# EAGLE board fmcboard_v1.6s (EAGLE 9.6.2), part 1 of 2
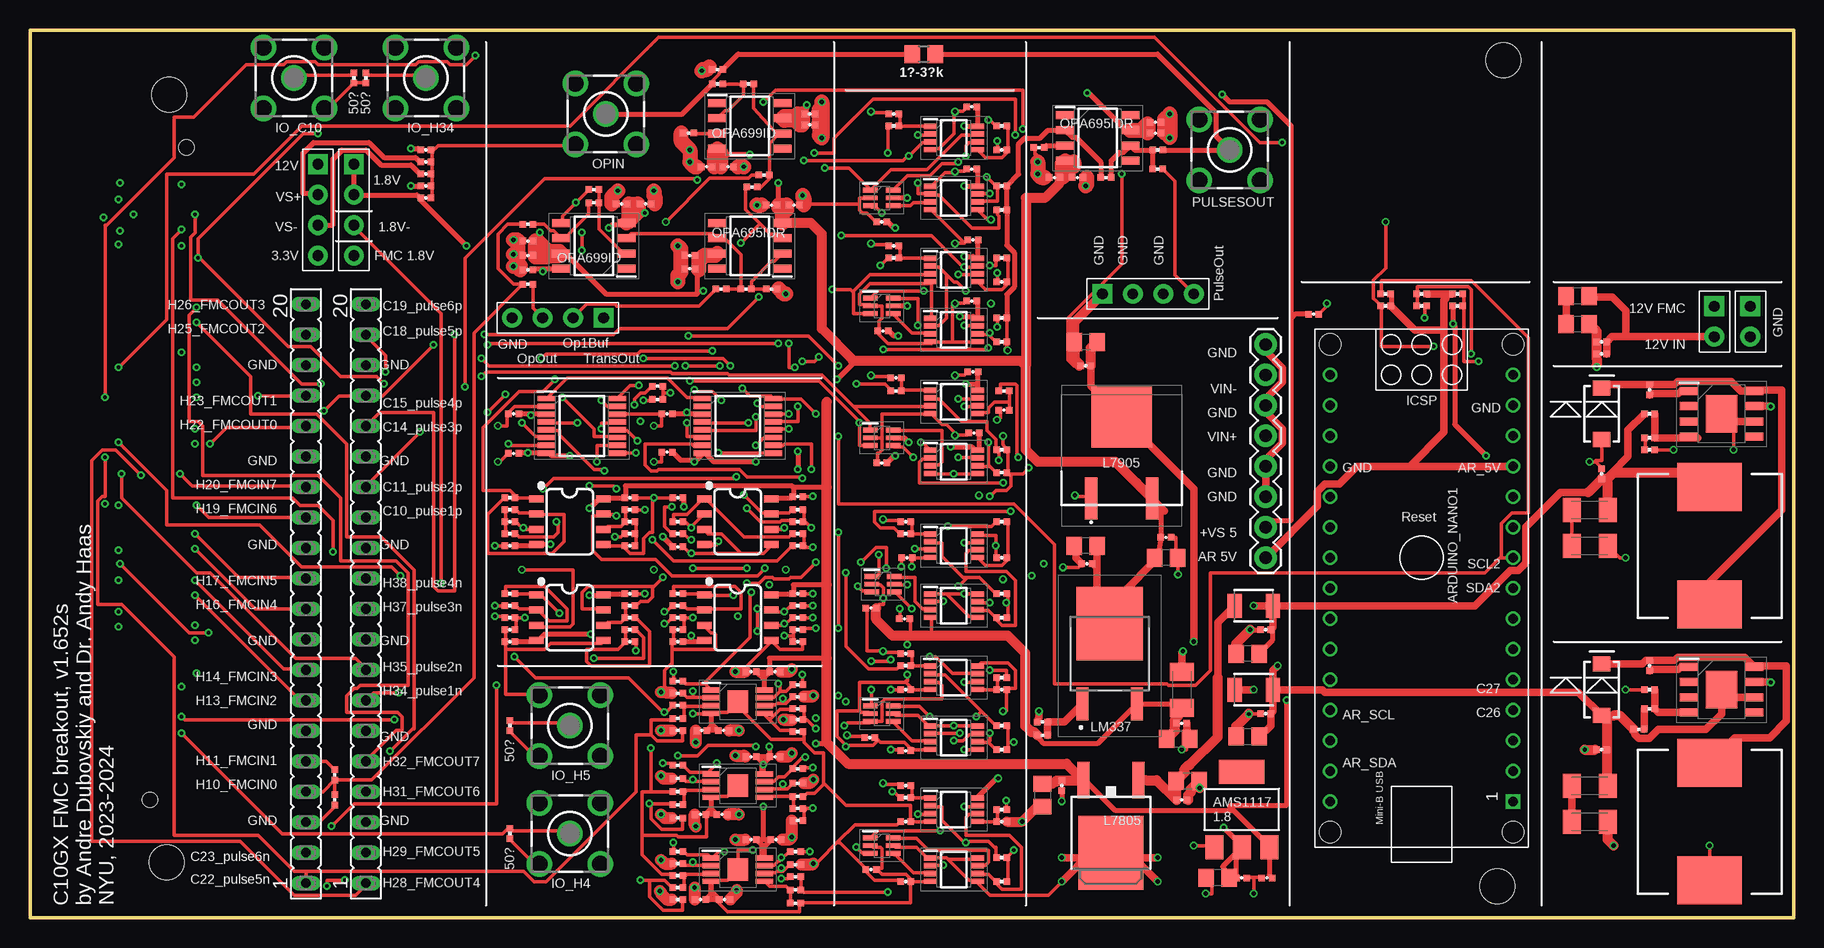
[diagram p0: board, top side]
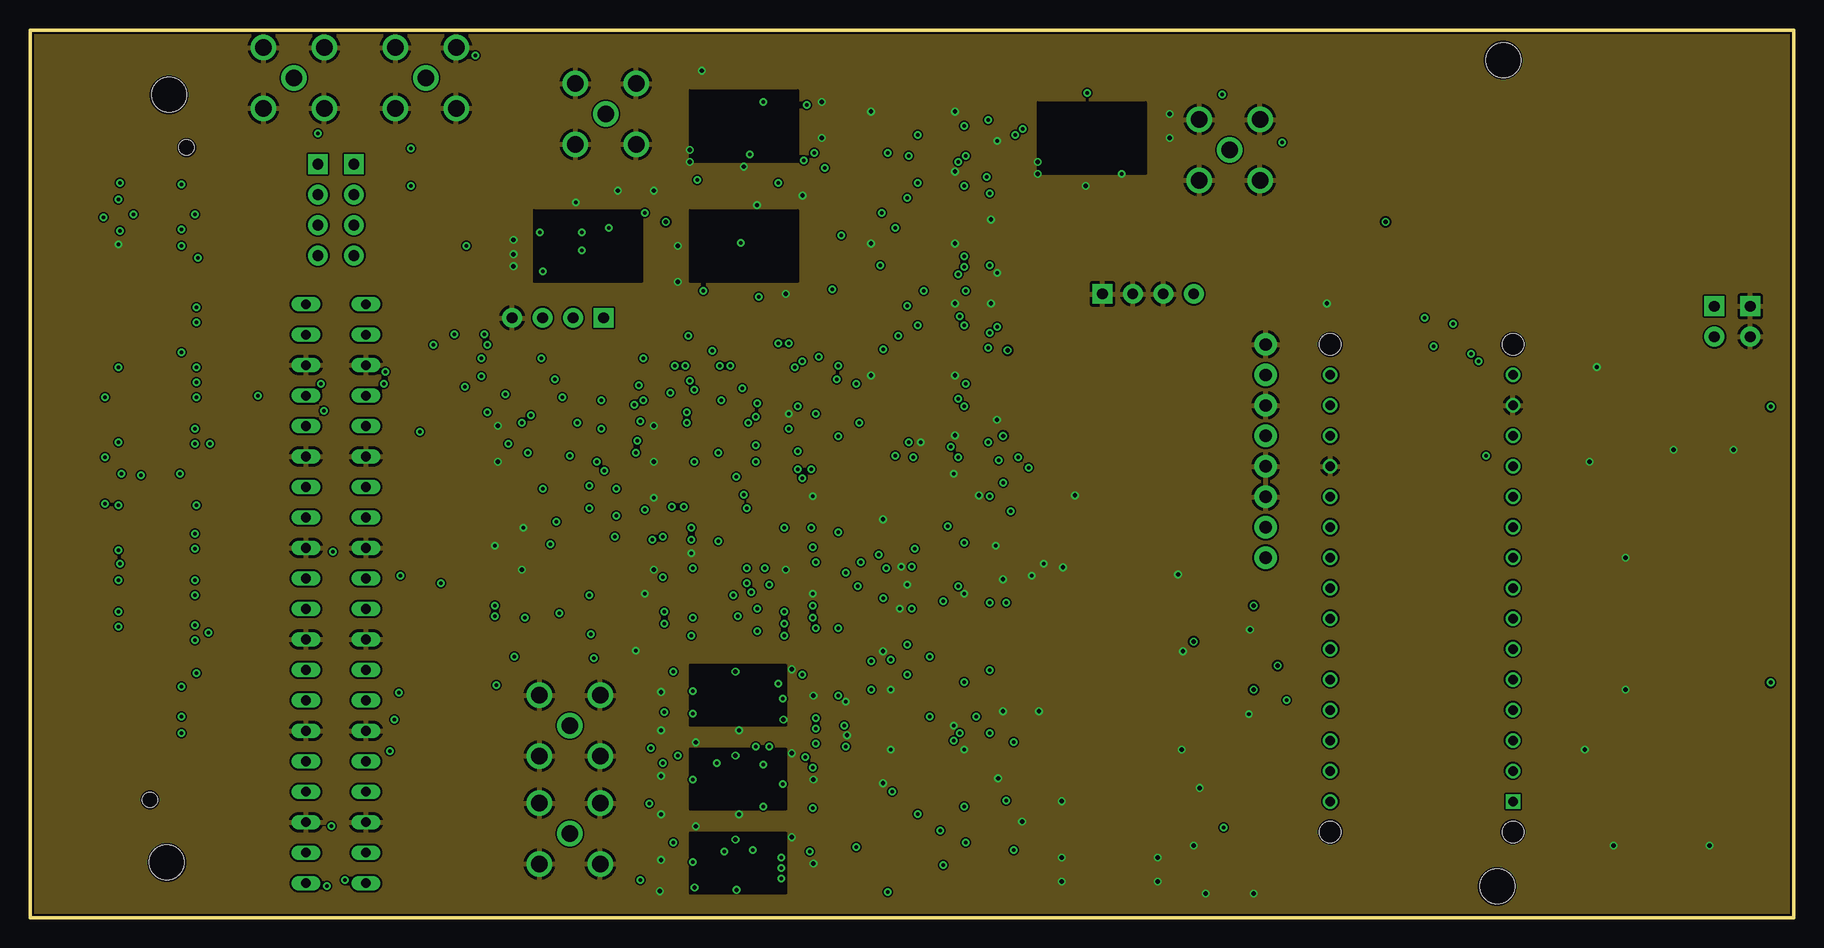
[diagram p1: board, inner layer topgnd]
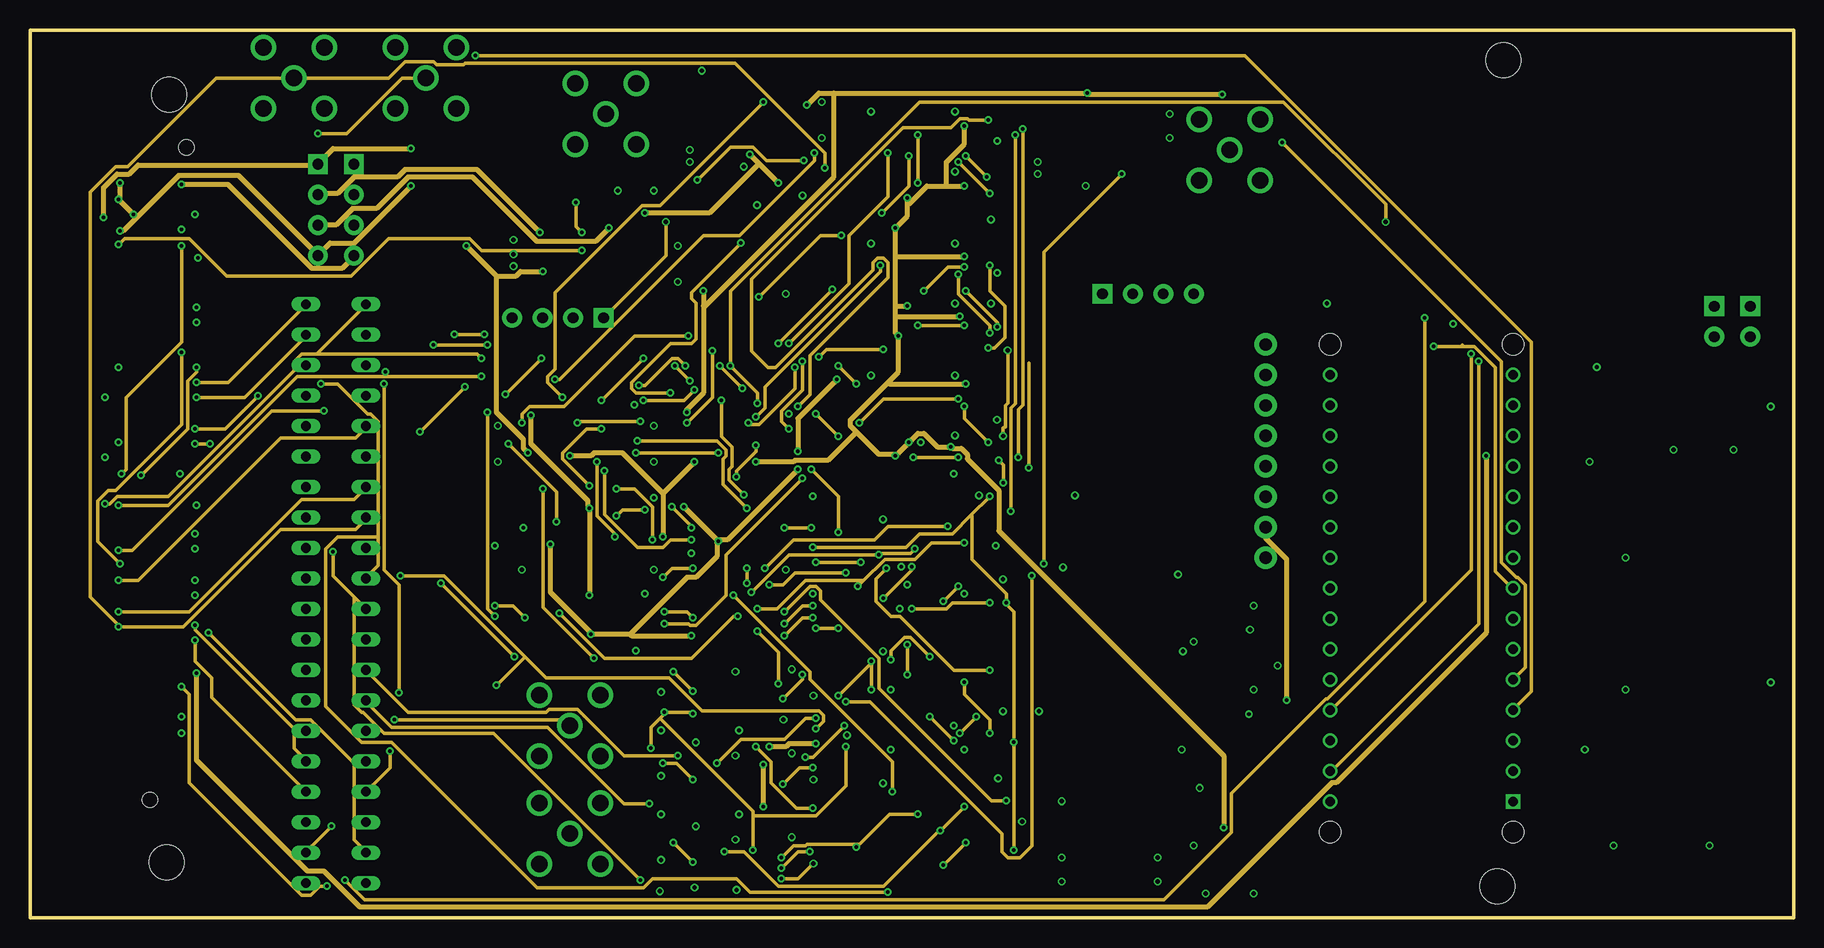
[diagram p2: board, inner layer route]
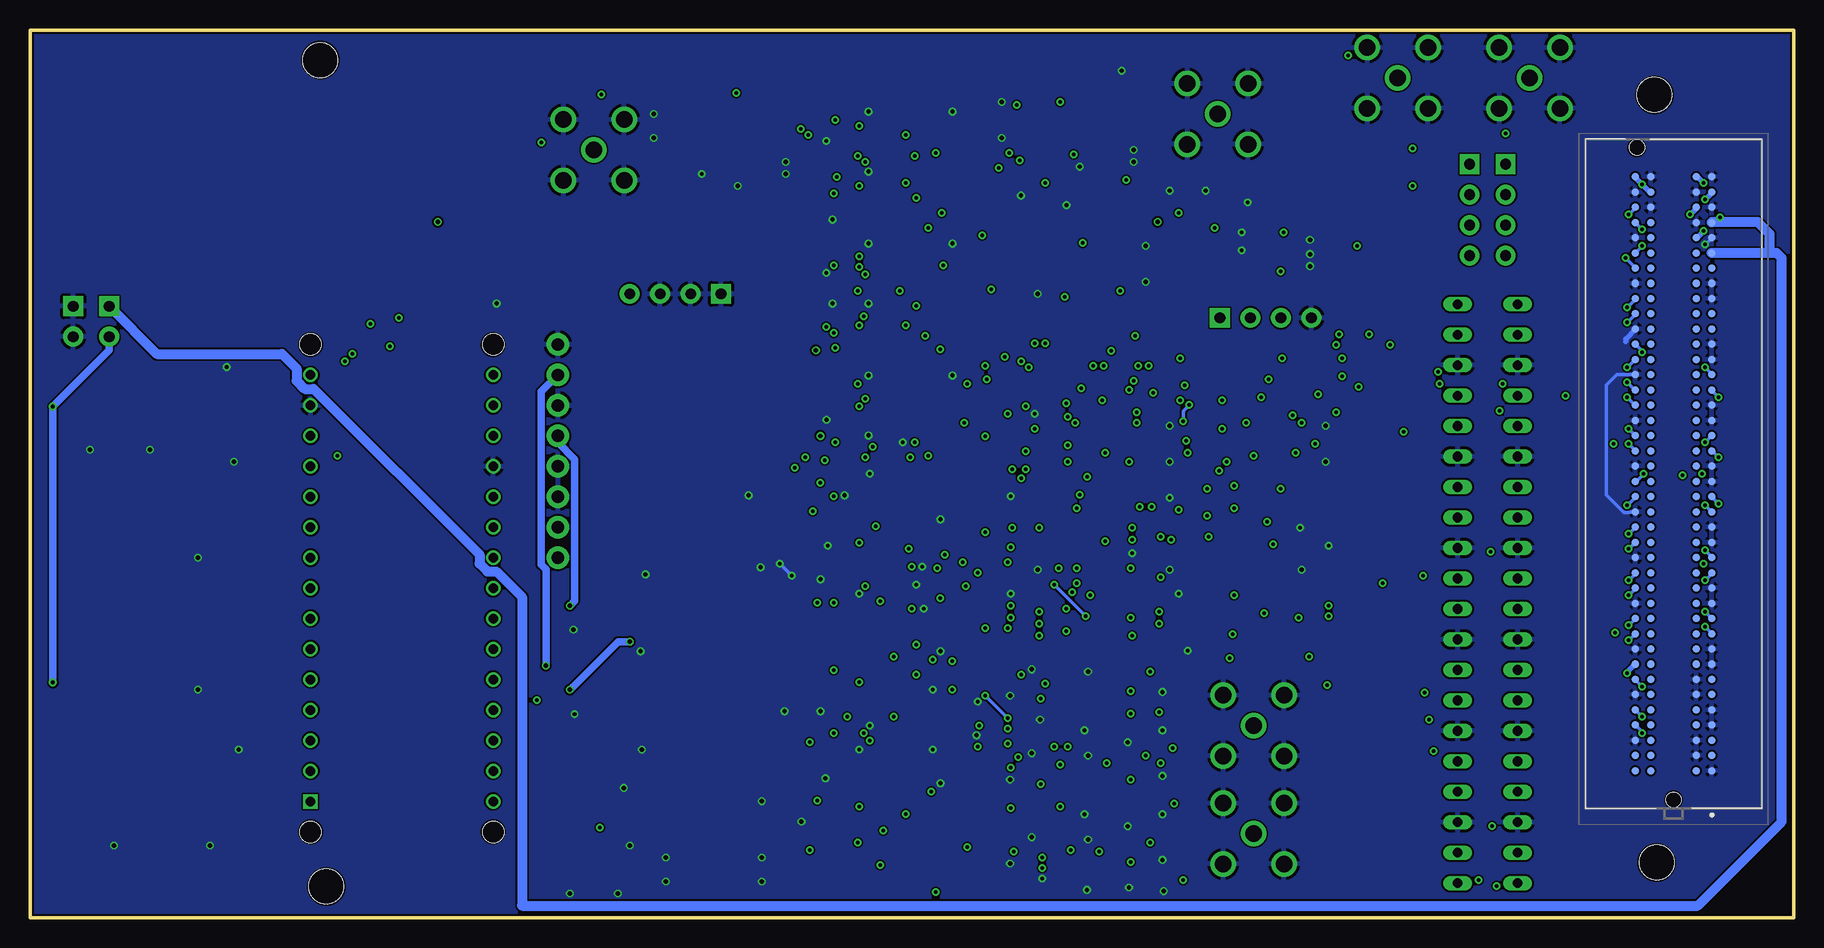
[diagram p3: board, bottom side, seen from below]

Size 147 x 74 mm. Coordinates in mm from the lower left corner, seen from the top.
Outline: 0,74 0,0 147,0 147,74 0,74
Copper layers (1*2*15*16): top 0.035mm / dielectric 0.2mm / topgnd 0.0175mm / dielectric 0.3mm / route 0.0175mm / dielectric 0.2mm / gnd 0.035mm
Design rules "Seeed_AllPCB_MacroFab_haas6mil *": minimum track width 6mil, minimum drill 12mil, track to track 6mil, track to pad 6mil, pad to pad 6mil, via to via 6mil, smd to smd 0mil, copper to edge 6mil, drill to drill 6mil, minimum pad ring 6mil, minimum via ring 6mil, stop-mask expansion 6mil, vias tented up to drill 25mil, thermal gap 10mil
Net classes: 0 default: width 0.305 mm; 1 power: width 0.406 mm; 2 gnd: width 0.305 mm
Holes 2.9 mm at 11.4,4.6 122.8,71.5 11.6,68.6 122.3,2.6

## Footprints (pad centres in the part's own frame; a part is rotated, then mirrored left to right if it is on the bottom)
ARDUINO_NANO = drill 0.8 square: 1 -20.32,-7.62 | drill 0.8: 2 -17.78,-7.62; 3 -15.24,-7.62; 4 -12.7,-7.62; 5 -10.16,-7.62; 6 -7.62,-7.62; 7 -5.08,-7.62; 8 -2.54,-7.62; 9 0,-7.62; 10 2.54,-7.62; 11 5.08,-7.62; 12 7.62,-7.62; 13 10.16,-7.62; 14 12.7,-7.62; 15 15.24,-7.62; 16 15.24,7.62; 17 12.7,7.62; 18 10.16,7.62; 19 7.62,7.62; 20 5.08,7.62; 21 2.54,7.62; 22 0,7.62; 23 -2.54,7.62; 24 -5.08,7.62; 25 -7.62,7.62; 26 -10.16,7.62; 27 -12.7,7.62; 28 -15.24,7.62; 29 -17.78,7.62; 30 -20.32,7.62 | hole 1.778: -22.86,-7.62; -22.86,7.62; 17.78,7.62; 17.78,-7.62
C0805 = smd 1.3 x 1.5: 1 -0.95,0; 2 0.95,0
0402_CAP = smd 0.536 x 0.546: 1 -0.433,0; 2 0.433,0
C1206K = smd 1.5 x 2: 1 -1.5,0; 2 1.5,0
SMA-DIODE = smd 1.27 x 1.47: A -2.15,0; C 2.15,0
SOIC127P600X175-8N = smd 1.528 x 0.65: 1 -2.711,1.905; 2 -2.711,0.635; 3 -2.711,-0.635; 4 -2.711,-1.905; 5 2.711,-1.905; 6 2.711,-0.635; 7 2.711,0.635; 8 2.711,1.905
SOP65P640X120-16N = smd 1.475 x 0.45: 1 -2.938,2.275; 2 -2.938,1.625; 3 -2.938,0.975; 4 -2.938,0.325; 5 -2.938,-0.325; 6 -2.938,-0.975; 7 -2.938,-1.625; 8 -2.938,-2.275; 9 2.938,-2.275; 10 2.938,-1.625; 11 2.938,-0.975; 12 2.938,-0.325; 13 2.938,0.325; 14 2.938,0.975; 15 2.938,1.625; 16 2.938,2.275
SOP65P490X110-9N = smd 1.425 x 0.45: 1 -2.212,0.975; 2 -2.212,0.325; 3 -2.212,-0.325; 4 -2.212,-0.975; 5 2.212,-0.975; 6 2.212,-0.325; 7 2.212,0.325; 8 2.212,0.975 | smd 1.68 x 1.88: 9 0,0
SO08 = smd 0.6 x 1.2: 1 -1.905,-2.8; 2 -0.635,-2.8; 3 0.635,-2.8; 4 1.905,-2.8; 5 1.905,2.8; 6 0.635,2.8; 7 -0.635,2.8; 8 -1.905,2.8
TO252 = smd 1 x 3.048: 1 -2.28,-3.556; 2 2.28,-3.556 | smd 5.4 x 6.2: 3 0,2.5
SOP65P400X130-8N = smd 1.1 x 0.45: 1 -1.95,0.975; 2 -1.95,0.325; 3 -1.95,-0.325; 4 -1.95,-0.975; 5 1.95,-0.975; 6 1.95,-0.325; 7 1.95,0.325; 8 1.95,0.975
SOT65P210X110-6N = smd 1.2 x 0.4: 1 -0.95,0.65; 2 -0.95,0; 3 -0.95,-0.65; 4 0.95,-0.65; 5 0.95,0; 6 0.95,0.65
MC7905ACD2TR4G = smd 1.016 x 3.504: 1 -2.54,-4.064; 3 2.54,-4.064 | smd 5.08 x 5.08: 2 0,2.745
SOT223 = smd 1.499 x 2.007: 1 -2.261,-3.15; 2 0.025,-3.15; 3 2.311,-3.15 | smd 3.81 x 2.007: 4 0,3.15
LM337KVURG3 = smd 1 x 2.75: 1 -2.29,-4.2; 3 2.29,-4.2 | smd 5.55 x 6.15: 2 0,2.5
SOIC127P600X170-9N = smd 1.525 x 0.65: 1 -2.712,1.905; 2 -2.712,0.635; 3 -2.712,-0.635; 4 -2.712,-1.905; 5 2.712,-1.905; 6 2.712,-0.635; 7 2.712,0.635; 8 2.712,1.905 | smd 2.6 x 3.1: 9 0,0
BU-SMB-V = drill 1.4: 1 0,0; 2 -2.54,2.54; 3 2.54,2.54; 4 2.54,-2.54; 5 -2.54,-2.54
1X08 = drill 1.016 pad 1.88: 1 0,0; 2 2.54,0; 3 5.08,0; 4 7.62,0; 5 10.16,0; 6 12.7,0; 7 15.24,0; 8 17.78,0
ASP13460401 = smd 0.64 x 0.64: C1 24.765,3.175; C2 23.495,3.175; C3 22.225,3.175; C4 20.955,3.175; C5 19.685,3.175; C6 18.415,3.175; C7 17.145,3.175; C8 15.875,3.175; C9 14.605,3.175; C10 13.335,3.175; C11 12.065,3.175; C12 10.795,3.175; C13 9.525,3.175; C14 8.255,3.175; C15 6.985,3.175; C16 5.715,3.175; C17 4.445,3.175; C18 3.175,3.175; C19 1.905,3.175; C20 0.635,3.175; C21 -0.635,3.175; C22 -1.905,3.175; C23 -3.175,3.175; C24 -4.445,3.175; C25 -5.715,3.175; C26 -6.985,3.175; C27 -8.255,3.175; C28 -9.525,3.175; C29 -10.795,3.175; C30 -12.065,3.175; C31 -13.335,3.175; C32 -14.605,3.175; C33 -15.875,3.175; C34 -17.145,3.175; C35 -18.415,3.175; C36 -19.685,3.175; C37 -20.955,3.175; C38 -22.225,3.175; C39 -23.495,3.175; C40 -24.765,3.175; D1 24.765,1.905; D2 23.495,1.905; D3 22.225,1.905; D4 20.955,1.905; D5 19.685,1.905; D6 18.415,1.905; D7 17.145,1.905; D8 15.875,1.905; D9 14.605,1.905; D10 13.335,1.905; D11 12.065,1.905; D12 10.795,1.905; D13 9.525,1.905; D14 8.255,1.905; D15 6.985,1.905; D16 5.715,1.905; D17 4.445,1.905; D18 3.175,1.905; D19 1.905,1.905; D20 0.635,1.905; D21 -0.635,1.905; D22 -1.905,1.905; D23 -3.175,1.905; D24 -4.445,1.905; D25 -5.715,1.905; D26 -6.985,1.905; D27 -8.255,1.905; D28 -9.525,1.905; D29 -10.795,1.905; D30 -12.065,1.905; D31 -13.335,1.905; D32 -14.605,1.905; D33 -15.875,1.905; D34 -17.145,1.905; D35 -18.415,1.905; D36 -19.685,1.905; D37 -20.955,1.905; D38 -22.225,1.905; D39 -23.495,1.905; D40 -24.765,1.905; G1 24.765,-1.905; G2 23.495,-1.905; G3 22.225,-1.905; G4 20.955,-1.905; G5 19.685,-1.905; G6 18.415,-1.905; G7 17.145,-1.905; G8 15.875,-1.905; G9 14.605,-1.905; G10 13.335,-1.905; G11 12.065,-1.905; G12 10.795,-1.905; G13 9.525,-1.905; G14 8.255,-1.905; G15 6.985,-1.905; G16 5.715,-1.905; G17 4.445,-1.905; G18 3.175,-1.905; G19 1.905,-1.905; G20 0.635,-1.905; G21 -0.635,-1.905; G22 -1.905,-1.905; G23 -3.175,-1.905; G24 -4.445,-1.905; G25 -5.715,-1.905; G26 -6.985,-1.905; G27 -8.255,-1.905; G28 -9.525,-1.905; G29 -10.795,-1.905; G30 -12.065,-1.905; G31 -13.335,-1.905; G32 -14.605,-1.905; G33 -15.875,-1.905; G34 -17.145,-1.905; G35 -18.415,-1.905; G36 -19.685,-1.905; G37 -20.955,-1.905; G38 -22.225,-1.905; G39 -23.495,-1.905; G40 -24.765,-1.905; H1 24.765,-3.175; H2 23.495,-3.175; H3 22.225,-3.175; H4 20.955,-3.175; H5 19.685,-3.175; H6 18.415,-3.175; H7 17.145,-3.175; H8 15.875,-3.175; H9 14.605,-3.175; H10 13.335,-3.175; H11 12.065,-3.175; H12 10.795,-3.175; H13 9.525,-3.175; H14 8.255,-3.175; H15 6.985,-3.175; H16 5.715,-3.175; H17 4.445,-3.175; H18 3.175,-3.175; H19 1.905,-3.175; H20 0.635,-3.175; H21 -0.635,-3.175; H22 -1.905,-3.175; H23 -3.175,-3.175; H24 -4.445,-3.175; H25 -5.715,-3.175; H26 -6.985,-3.175; H27 -8.255,-3.175; H28 -9.525,-3.175; H29 -10.795,-3.175; H30 -12.065,-3.175; H31 -13.335,-3.175; H32 -14.605,-3.175; H33 -15.875,-3.175; H34 -17.145,-3.175; H35 -18.415,-3.175; H36 -19.685,-3.175; H37 -20.955,-3.175; H38 -22.225,-3.175; H39 -23.495,-3.175; H40 -24.765,-3.175 | hole 1.27: 27.189,0; -27.191,-3.05
H2-2.54 = drill 0.889 pad 1.651 square: 1 0,1.27 | drill 0.889 pad 1.651: 2 0,-1.27
H4-2.54 = drill 0.889 pad 1.651 square: 1 0,3.81 | drill 0.889 pad 1.651: 2 0,1.27; 3 0,-1.27; 4 0,-3.81
1210 = smd 1.2 x 2: 1 -1.6,0; 2 1.6,0
CDRH125 = smd 5.4 x 4: 1 0,4.9; 2 0,-4.9
0402_RES = smd 0.536 x 0.546: 1 -0.433,0; 2 0.433,0
R0805 = smd 1.3 x 1.5: 1 -0.95,0; 2 0.95,0
FE20 = drill 0.813 long: 1 -24.13,0; 2 -21.59,0; 3 -19.05,0; 4 -16.51,0; 5 -13.97,0; 6 -11.43,0; 7 -8.89,0; 8 -6.35,0; 9 -3.81,0; 10 -1.27,0; 11 1.27,0; 12 3.81,0; 13 6.35,0; 14 8.89,0; 15 11.43,0; 16 13.97,0; 17 16.51,0; 18 19.05,0; 19 21.59,0; 20 24.13,0

## Placement (x,y rotation side)
ARDUINO_NANO1  1  [ARDUINO_NANO]  116,30 90 top
C1  10uF  [C0805]  101.5,22 180 top
C3  0.1uF  [0402_CAP]  103.1,3.3 180 top
C4  0.1uF  [0402_CAP]  62.1,20.5 0 top
C5  0.1uF  [0402_CAP]  33,60 0 top
C6  0.1uF  [0402_CAP]  107,50.3 0 top
C7  0.1uF  [0402_CAP]  41.5,54 180 top
C8  0.1uF  [0402_CAP]  131,47 180 top
C9  0.1uF  [0402_CAP]  40.3,42 180 top
C10  0.1uF  [0402_CAP]  33,62 0 top
C11  0.1uF  [0402_CAP]  131,48 180 top
C12  0.1uF  [0402_CAP]  33,64 0 top
C13  0.1uF  [0402_CAP]  33,61 0 top
C14  0.1uF  [0402_CAP]  53.1,38.8 180 top
C15  0.1uF  [0402_CAP]  54,35 180 top
C16  0.1uF  [0402_CAP]  93.8,66.3 0 top
C17  1uF  [0402_CAP]  73,22 0 top
C18  1uF  [0402_CAP]  81,19 180 top
C19  1uF  [0402_CAP]  73,11 0 top
C20  1uF  [0402_CAP]  81,8 180 top
C21  0.1uF  [0402_CAP]  40,23 180 top
C22  0.1uF  [0402_CAP]  62.1,13.4 0 top
C23  0.1uF  [0402_CAP]  57.9,1.5 0 top
C24  0.1uF  [0402_CAP]  62.2,6.5 0 top
C25  0.1uF  [0402_CAP]  94.7,31.7 0 top
C26  0.1uF  [0402_CAP]  55,54.1 180 top
C27  0.1uF  [0402_CAP]  61.8,59.4 180 top
C28  0.1uF  [0402_CAP]  41.5,56.4 180 top
C29  0.1uF  [0402_CAP]  49.3,59.5 180 top
C30  0.1uF  [0402_CAP]  70.1,25.8 180 top
C31  1uF  [0402_CAP]  81.2,42.3 180 top
C32  100pF  [0402_CAP]  93.8,65.4 0 top
C33  0.1uF  [0402_CAP]  88.1,29.5 180 top
C34  10uF  [C0805]  99,3.3 180 top
C35  0.1uF  [0402_CAP]  78.5,67.6 180 top
C36  0.1uF  [0402_CAP]  54,30.9 0 top
C37  0.1uF  [0402_CAP]  50,27 0 top
C38  10uF  [C0805]  84.4,10.2 270 top
C39  10uF  [C0805]  94.7,30 180 top
C41  10uF  [C0805]  101.5,15.1 0 top
C42  0.1uF  [0402_CAP]  103,24 180 top
C43  0.1uF  [0402_CAP]  96,9.8 0 top
C44  0.1uF  [0402_CAP]  103,17 0 top
C45  0.1uF  [0402_CAP]  88,46 0 top
C46  0.1uF  [0402_CAP]  87.3,61.7 180 top
C47  0.1uF  [0402_CAP]  86,11 270 top
C48  0.1uF  [0402_CAP]  64,35.1 0 top
C49  0.1uF  [0402_CAP]  71.1,48.9 180 top
C50  0.1uF  [0402_CAP]  73,3 180 top
C51  0.1uF  [0402_CAP]  73,8 180 top
C52  0.1uF  [0402_CAP]  78.5,62.4 180 top
C53  0.1uF  [0402_CAP]  78.6,56.5 180 top
C54  0.1uF  [0402_CAP]  53.1,42 180 top
C55  0.1uF  [0402_CAP]  40.3,38.7 180 top
C56  1uF  [0402_CAP]  54,24 0 top
C57  1uF  [0402_CAP]  40,24 0 top
C58  1uF  [0402_CAP]  72,56 0 top
C59  1uF  [0402_CAP]  72,67 0 top
C60  1uF  [0402_CAP]  64,23 0 top
C61  1uF  [0402_CAP]  50,23 0 top
C62  1uF  [0402_CAP]  81,53 180 top
C63  1uF  [0402_CAP]  81,64 180 top
C64  10uF  [C0805]  129,51.8 180 top
C65  0.1uF  [0402_CAP]  96,16.2 0 top
C66  0.1uF  [0402_CAP]  73,13.9 180 top
C67  0.1uF  [0402_CAP]  73,19 180 top
C68  0.1uF  [0402_CAP]  71,58 180 top
C69  0.1uF  [0402_CAP]  78.5,51.4 180 top
C70  0.1uF  [0402_CAP]  70.1,4 180 top
C71  0.1uF  [0402_CAP]  70,15 180 top
C72  0.1uF  [0402_CAP]  55.9,8.6 180 top
C73  0.1uF  [0402_CAP]  64,27 0 top
C74  0.1uF  [0402_CAP]  101,3.3 0 top
C75  0.1uF  [0402_CAP]  33,63 0 top
C76  0.1uF  [0402_CAP]  54,23 180 top
C77  10uF  [C0805]  88,31 180 top
C78  0.1uF  [0402_CAP]  65,67 0 top
C79  0.1uF  [0402_CAP]  58.2,62.6 0 top
C81  100pF  [0402_CAP]  63.7,59.4 0 top
C82  100pF  [0402_CAP]  55,55.2 180 top
C83  100pF  [0402_CAP]  56.4,62.6 180 top
C84  100pF  [0402_CAP]  65,66.1 0 top
C85  100pF  [0402_CAP]  85.4,61.7 180 top
C86  10uF  [C0805]  95.7,14.9 0 top
C87  100pF  [0402_CAP]  41.5,55.2 180 top
C88  100pF  [0402_CAP]  51.3,59.5 0 top
C89  1uF  [0402_CAP]  50,31 180 top
C90  1uF  [0402_CAP]  72.2,45 180 top
C91  100pF  [0402_CAP]  60.1,6.5 180 top
C92  100pF  [0402_CAP]  55.9,1.5 180 top
C93  100pF  [0402_CAP]  60.1,13.4 180 top
C94  100pF  [0402_CAP]  57.7,8.6 0 top
C95  0.1uF  [0402_CAP]  57.8,15.6 0 top
C96  1uF  [0402_CAP]  40,33 0 top
C97  0.1uF  [0402_CAP]  50,35 0 top
C98  0.1uF  [0402_CAP]  40,31 180 top
C99  1uF  [0402_CAP]  73,33 0 top
C100  1uF  [0402_CAP]  81,30 0 top
C101  0.1uF  [0402_CAP]  73.1,30 180 top
C102  0.1uF  [0402_CAP]  78.6,45.5 180 top
C103  0.1uF  [0402_CAP]  78.7,40.4 180 top
C104  0.1uF  [0402_CAP]  72.9,24.9 180 top
C105  0.1uF  [0402_CAP]  71,37.9 180 top
C106  0.1uF  [0402_CAP]  131,14 0 top
C107  0.01uF  [0402_CAP]  135,21 90 top
C108  100uF  [C1206K]  130,11 0 top
C109  100uF  [C1206K]  130,8 180 top
C110  10uF  [C0805]  96.5,11.4 0 top
C111  10uF  [C0805]  88,48 0 top
C116  100pF  [0402_CAP]  60.1,20.5 180 top
C117  100pF  [0402_CAP]  56,15.6 180 top
C120  10uF  [C0805]  129,49.5 0 top
C121  0.1uF  [0402_CAP]  131,37 90 top
C122  0.01uF  [0402_CAP]  135,44 90 top
C123  100uF  [C1206K]  130,31 0 top
C124  100uF  [C1206K]  130,34 180 top
C125  100uF  [C1206K]  96,19 90 top
D1  B340A  [SMA-DIODE]  131,42 90 top
D2  B340A  [SMA-DIODE]  131,19 90 top
IC1  OPA699ID  [SOIC127P600X175-8N]  60,66 0 top
IC2  DAC7578SPWR  [SOP65P640X120-16N]  59,41 0 top
IC3  LTC6229IMS8E#TRPBF  [SOP65P490X110-9N]  59,11 0 top
IC4  OPA695IDR  [SOIC127P600X175-8N]  89,65 0 top
IC5  LTC6229IMS8E#TRPBF  [SOP65P490X110-9N]  59,4 0 top
IC6  OPA695IDR  [SOIC127P600X175-8N]  60,56 180 top
IC7  OPA699ID  [SOIC127P600X175-8N]  47,56 180 top
IC8  LM358  [SO08]  45,25 270 top
IC9  LM358  [SO08]  59,25 270 top
IC10  LM358  [SO08]  59,33 270 top
IC11  7805DT  [TO252]  90.1,7.9 180 top
IC12  SN74AUC2G66DCTR  [SOP65P400X130-8N]  77,65 0 top
IC13  SN74AUC2G66DCTR  [SOP65P400X130-8N]  77,54 0 top
IC14  SN74AUC2G66DCTR  [SOP65P400X130-8N]  77,20 0 top
IC15  SN74AUC2G66DCTR  [SOP65P400X130-8N]  77,9 0 top
IC16  DAC7578SPWR  [SOP65P640X120-16N]  46,41 0 top
IC17  SN74AUC2G66DCTR  [SOP65P400X130-8N]  77,60 0 top
IC18  SN74AUC2G66DCTR  [SOP65P400X130-8N]  77,49 0 top
IC19  SN74AUC2G66DCTR  [SOP65P400X130-8N]  77,15 0 top
IC20  SN74AUC2G66DCTR  [SOP65P400X130-8N]  77,4 0 top
IC21  74AUP2GU04GW  [SOT65P210X110-6N]  71,60 0 top
IC22  74AUP2GU04GW  [SOT65P210X110-6N]  71,17 0 top
IC23  74AUP2GU04GW  [SOT65P210X110-6N]  71,51 0 top
IC24  74AUP2GU04GW  [SOT65P210X110-6N]  71,6 0 top
IC25  MC7905ACD2TR4G  [MC7905ACD2TR4G]  91,39 0 top
IC26  AMS1117-1.8  [SOT223]  101,9 0 top
IC27  LM358  [SO08]  45,33 270 top
IC28  SN74AUC2G66DCTR  [SOP65P400X130-8N]  77,31 0 top
IC29  LM337KVURG3  [LM337KVURG3]  90,22 0 top
IC30  SN74AUC2G66DCTR  [SOP65P400X130-8N]  77,43 0 top
IC31  SN74AUC2G66DCTR  [SOP65P400X130-8N]  77,38 0 top
IC32  SN74AUC2G66DCTR  [SOP65P400X130-8N]  77,26 0 top
IC33  LTC6229IMS8E#TRPBF  [SOP65P490X110-9N]  59,18 0 top
IC34  74AUP2GU04GW  [SOT65P210X110-6N]  71,40 0 top
IC35  74AUP2GU04GW  [SOT65P210X110-6N]  71.1,27.8 0 top
IC36  TPS5430DDAR  [SOIC127P600X170-9N]  141,19 0 top
IC37  TPS5430DDAR  [SOIC127P600X170-9N]  141,42 0 top
IO_C10  BU-SMB-V  [BU-SMB-V]  22,70 270 top
IO_H4  BU-SMB-V  [BU-SMB-V]  45,7 270 top
IO_H5  BU-SMB-V  [BU-SMB-V]  45,16 270 top
IO_H34  BU-SMB-V  [BU-SMB-V]  33,70 270 top
J1  8pin  [1X08]  103,30 90 top
J2  ASP-134604-01  [ASP13460401]  10,37 270 bottom
J3  2p-2.54  [H2-2.54]  143.4,49.7 0 top
J5  4p-2.54  [H4-2.54]  44,50 270 top
J8  4p-2.54  [H4-2.54]  24,59 0 top
J9  2p-2.54  [H2-2.54]  140.4,49.7 0 top
J12  4p-2.54  [H4-2.54]  27,59 0 top
J13  4p-2.54  [H4-2.54]  93.2,52 90 top
L1  10uH  [1210]  102,26 180 top
L2  10uH  [1210]  102,19 180 top
L3  10uH  [CDRH125]  140,31 180 top
L4  10uH  [CDRH125]  140,8 0 top
OPIN  BU-SMB-V  [BU-SMB-V]  48,67 90 top
PULSESOUT  BU-SMB-V  [BU-SMB-V]  100,64 0 top
R1  470  [0402_RES]  89.7,61.7 0 top
R2  47  [0402_RES]  57.3,69.5 180 top
R3  10  [0402_RES]  54.9,65.4 180 top
R4  50?  [0402_RES]  27,70 90 top
R5  50?  [0402_RES]  28,70 90 top
R6  1k  [0402_RES]  47,59.6 180 top
R7  470  [0402_RES]  81,59 180 top
R8  470  [0402_RES]  81,50 180 top
R9  1?-3?k  [R0805]  74.5,72 0 top
R10  100  [0402_RES]  25.4,9.8 90 top
R11  1k  [0402_RES]  59.9,69.5 180 top
R12  470  [0402_RES]  81,16 180 top
R13  10  [0402_RES]  84.1,64.2 180 top
R14  100  [0402_RES]  84.4,15.2 0 top
R15  50?  [0402_RES]  40,7 90 top
R16  50?  [0402_RES]  40,16 90 top
R17  1k  [0402_RES]  64,33 180 top
R18  1k  [0402_RES]  59.7,52.4 180 top
R19  47  [0402_RES]  61.8,52.4 180 top
R20  47  [0402_RES]  60.2,60.9 0 top
R21  330  [0402_RES]  54,9.4 180 top
R22  330  [0402_RES]  54,10.5 180 top
R23  330  [0402_RES]  54,12.7 180 top
R24  330  [0402_RES]  54,11.6 180 top
R25  330  [0402_RES]  52.3,43.2 180 top
R26  100  [0402_RES]  47,60.7 0 top
R27  330  [0402_RES]  64,9.1 180 top
R28  330  [0402_RES]  64,10.1 180 top
R29  330  [0402_RES]  64,12.4 180 top
R30  330  [0402_RES]  64,11.2 180 top
R31  330  [0402_RES]  52.3,44.3 180 top
R32  470  [0402_RES]  81,5 180 top
R33  470  [0402_RES]  81,61 180 top
R34  47  [0402_RES]  94,64 0 top
R35  1k  [0402_RES]  54,33 180 top
R36  470  [0402_RES]  81,48 180 top
R37  330  [0402_RES]  54,2.5 180 top
R38  470  [0402_RES]  81,14 180 top
R39  330  [0402_RES]  54,3.5 180 top
R40  470  [0402_RES]  81,3 180 top
R41  330  [0402_RES]  54,5.5 180 top
R42  100  [0402_RES]  57.3,70.7 180 top
R43  330  [0402_RES]  54,4.5 180 top
R44  330  [0402_RES]  63.8,2.3 180 top
R45  330  [0402_RES]  63.8,1.2 180 top
R46  330  [0402_RES]  63.8,5.5 180 top
R47  100  [0402_RES]  72,66 0 top
R48  4.7k  [0402_RES]  113,51 180 top
R49  4.7k  [0402_RES]  113,52 180 top
R50  4.7k  [0402_RES]  119,52 0 top
R51  4.7k  [0402_RES]  116,52 180 top
R52  330  [0402_RES]  63.8,4.4 180 top
R53  100  [0402_RES]  72,55 0 top
R54  100  [0402_RES]  40,25 0 top
R55  100  [0402_RES]  54,25 0 top
R56  100  [0402_RES]  81,66 180 top
R57  100  [0402_RES]  81,55 180 top
R58  100  [0402_RES]  50,24 0 top
R59  100  [0402_RES]  64,24 0 top
R60  1k  [0402_RES]  135,40 0 top
R61  1k  [0402_RES]  54,32 0 top
R62  1k  [0402_RES]  50,26 0 top
R63  1k  [0402_RES]  40,27 0 top
R64  1k  [0402_RES]  40,26 180 top
R65  1k  [0402_RES]  50,25 0 top
R66  1k  [0402_RES]  64,26 180 top
R67  1k  [0402_RES]  54,27 0 top
R68  1k  [0402_RES]  54,26 180 top
R69  1k  [0402_RES]  64,25 0 top
R70  47  [0402_RES]  84.4,16.3 180 top
R71  10  [0402_RES]  94,62.4 180 top
R72  10  [0402_RES]  57.6,52.4 0 top
R73  10k  [0402_RES]  135,42 180 top
R74  100  [0402_RES]  73,21 180 top
R75  100  [0402_RES]  81,20 0 top
R76  100  [0402_RES]  73,10 180 top
R77  100  [0402_RES]  81,9 0 top
R78  10  [0402_RES]  25.4,11.9 270 top
R79  1k  [0402_RES]  64,31 180 top
R80  330  [0402_RES]  54,8.3 180 top
R81  330  [0402_RES]  64,8.1 180 top
R82  330  [0402_RES]  63.8,3.4 180 top
R83  330  [0402_RES]  54,1.5 180 top
R84  1k  [0402_RES]  135,39 180 top
R85  1k  [0402_RES]  64,32 180 top
R86  10  [0402_RES]  41.5,52.8 180 top
R87  4.7k  [0402_RES]  119,51 0 top
R88  10  [0402_RES]  41.5,57.8 0 top
R89  10  [0402_RES]  61.2,61.9 0 top
R90  4.7k  [0402_RES]  116,51 180 top
R91  330  [0402_RES]  54,16.6 180 top
R92  100  [0402_RES]  81.2,43.9 180 top
R93  100  [0402_RES]  50,32 180 top
R94  100  [0402_RES]  72.2,43.9 180 top
R95  100  [0402_RES]  40,32 0 top
R96  1k  [0402_RES]  50,34 0 top
R97  1k  [0402_RES]  40,35 0 top
R98  1k  [0402_RES]  40,34 180 top
R99  1k  [0402_RES]  50,33 0 top
R100  100  [0402_RES]  73,32 180 top
R101  100  [0402_RES]  81,33 180 top
R102  330  [0402_RES]  54,17.7 180 top
R103  330  [0402_RES]  54,19.7 180 top
R104  330  [0402_RES]  54,18.7 180 top
R105  330  [0402_RES]  64,17.4 180 top
R106  330  [0402_RES]  64,15.5 180 top
R107  330  [0402_RES]  64,19.4 180 top
R108  330  [0402_RES]  64,18.4 180 top
R109  330  [0402_RES]  54,15.6 180 top
R110  330  [0402_RES]  64,16.5 180 top
R111  470  [0402_RES]  81,39 180 top
R112  470  [0402_RES]  81,27 180 top
R113  470  [0402_RES]  81,37.1 180 top
R114  470  [0402_RES]  81,25 180 top
R115  1k  [0402_RES]  64,34 180 top
R116  1k  [0402_RES]  135,17.4 0 top
R117  1k  [0402_RES]  134.1,15.7 0 top
R118  10k  [0402_RES]  135,19 180 top
SV1  20  [FE20]  23,27 90 top
SV2  20  [FE20]  28,27 90 top

## Library data of the parts
ARDUINO_NANO1 = ArduinoNanoV30
C1 C34 C38 C39 C41 C64 C77 C86 C108-C111 C120 C123-C125 = rcl; SPICEPREFIX: C
C3-C33 C35-C37 C42-C63 C65-C76 C78 C79 C81-C85 C87-C107 C116 C117 C121 C122 R1-R8 R10-R118 = passives
D1 D2 = SparkFun-DiscreteSemi; JLC_ROTATION: 180; LCSC: C64982; PROD_ID: DIO-09886
IC1 IC7 = OPA699ID; DESCRIPTION: Texas Instruments OPA699ID Op Amp, 880MHz, 9 V, 8-Pin SOIC; HEIGHT: 1.75mm; JLC_ROTATION: 270; MANUFACTURER_NAME: Texas Instruments; MANUFACTURER_PART_NUMBER: OPA699ID; MOUSER_PART_NUMBER: 595-OPA699ID; MOUSER_PRICE-STOCK: https://www.mouser.co.uk/ProductDetail/Texas-Instruments/OPA699ID?qs=wgAEGBTxy7n0Nk%252BpyQzyiA%3D%3D
IC2 IC16 = DAC7578SPWR; DESCRIPTION: 12-bit, Octal Channel, Ultra-Low Glitch, Voltage Output, 2-Wire Interface DAC; HEIGHT: 1.2mm; MANUFACTURER_NAME: Texas Instruments; MANUFACTURER_PART_NUMBER: DAC7578SPWR; MOUSER_PART_NUMBER: 595-DAC7578SPWR; MOUSER_PRICE-STOCK: https://www.mouser.co.uk/ProductDetail/Texas-Instruments/DAC7578SPWR?qs=EuM%2FBx4ov4Q5WBxZ%252BdwNrg%3D%3D
IC3 IC5 IC33 = LTC6229IMS8E#TRPBF; DESCRIPTION: High Speed Operational Amplifiers Prec, Low Drift & Noise Hi Speed Amp; HEIGHT: 1.1mm; MANUFACTURER_NAME: Analog Devices; MANUFACTURER_PART_NUMBER: LTC6229IMS8E#TRPBF; MOUSER_PART_NUMBER: 584-LTC6229IMS8E#TR; MOUSER_PRICE-STOCK: https://www.mouser.co.uk/ProductDetail/Analog-Devices/LTC6229IMS8ETRPBF?qs=BJlw7L4Cy7%252B3qToO7Cz9NQ%3D%3D
IC4 IC6 = OPA695IDR; DESCRIPTION: High Speed Operational Amplifiers Ultra-Wideband Curre nt Feedback; HEIGHT: 1.75mm; JLC_ROTATION: 270; MANUFACTURER_NAME: Texas Instruments; MANUFACTURER_PART_NUMBER: OPA695IDR; MOUSER_PART_NUMBER: 595-OPA695IDR; MOUSER_PRICE-STOCK: https://www.mouser.co.uk/ProductDetail/Texas-Instruments/OPA695IDR?qs=wgAEGBTxy7loIslyoQGyeQ%3D%3D
IC8-IC10 IC27 = SparkFun-IC-Amplifiers; PROD_ID: NA-XXXXX
IC11 = adafruit; JLC_ROTATION: 270
IC12-IC15 IC17-IC20 IC28 IC30-IC32 = SN74AUC2G66DCTR; DESCRIPTION: Dual Bilateral Analog Switch; HEIGHT: 1.3mm; MANUFACTURER_NAME: Texas Instruments; MANUFACTURER_PART_NUMBER: SN74AUC2G66DCTR; MOUSER_PART_NUMBER: 595-SN74AUC2G66DCTR; MOUSER_PRICE-STOCK: https://www.mouser.co.uk/ProductDetail/Texas-Instruments/SN74AUC2G66DCTR?qs=X3IDIfI%252BJAXYLrXiJRkcqA%3D%3D
IC21-IC24 IC34 IC35 = 74AUP2GU04GW_125; DESCRIPTION: Inverters DUAL UNBUFF INVERTER 1.8V; HEIGHT: 1.1mm; JLC_ROTATION: 270; MANUFACTURER_NAME: Nexperia; MANUFACTURER_PART_NUMBER: 74AUP2GU04GW,125; MOUSER_PART_NUMBER: 771-74AUP2GU04GW-G; MOUSER_PRICE-STOCK: https://www.mouser.com/Search/Refine.aspx?Keyword=771-74AUP2GU04GW-G
IC25 = MC7905ACD2TR4G; DESCRIPTION: ON SEMICONDUCTOR - MC7905ACD2TR4G - Fixed LDO Voltage Regulator, 7905, -35V in, 1.3V Dropout, -5V/1A out, TO-263-3; HEIGHT: 4.572mm; JLC_ROTATION: 90; LCSC: C78860; MANUFACTURER_NAME: onsemi; MANUFACTURER_PART_NUMBER: MC7905ACD2TR4G; MOUSER_PART_NUMBER: 863-MC7905ACD2TR4G; MOUSER_PRICE-STOCK: https://www.mouser.co.uk/ProductDetail/onsemi/MC7905ACD2TR4G?qs=%252B9%2Fcbd0IE0ROAS%2F2lHbmwg%3D%3D; MPN: CJ7905
IC26 = burr-brown; JLC_ROTATION: 270; MPN: REG1117; OC_FARNELL: 1097566; OC_NEWARK: 14P6981
IC29 = LM337KVURG3; DESCRIPTION: 3 Pin 1.5A Adjustable Negative Voltage Regulator; HEIGHT: 2.65mm; JLC_ROTATION: 270; MANUFACTURER_NAME: Texas Instruments; MANUFACTURER_PART_NUMBER: LM337KVURG3; MOUSER_PART_NUMBER: 595-LM337KVURG3; MOUSER_PRICE-STOCK: https://www.mouser.co.uk/ProductDetail/Texas-Instruments/LM337KVURG3?qs=iSMark9AYDXYOGB3Dr0rVg%3D%3D
IC36 IC37 = TPS5430DDAR; DESCRIPTION: Texas Instruments, TPS5430DDAR Step-Down Switching Regulator 3A Adjustable, 1.22 31 V, 8-Pin SOIC; HEIGHT: 1.7mm; MANUFACTURER_NAME: Texas Instruments; MANUFACTURER_PART_NUMBER: TPS5430DDAR; MOUSER_PART_NUMBER: 595-TPS5430DDAR; MOUSER_PRICE-STOCK: https://www.mouser.co.uk/ProductDetail/Texas-Instruments/TPS5430DDAR?qs=zwk82MlA57ZJdOTovH1aYA%3D%3D
IO_C10 IO_H4 IO_H5 IO_H34 OPIN PULSESOUT = con-coax; OC_FARNELL: unknown; OC_NEWARK: unknown
J1 = SparkFun-Connectors; PROD_ID: CONN-08438
J2 = ASP-134604-01; DESCRIPTION: SAMTEC - ASP-134604-01 - Board-To-Board Connector, Vita 57 XMC, 1.27 mm, 160 Contacts, Header, ASP Series, Surface Mount; HEIGHT: 7.11mm; MANUFACTURER_NAME: SAMTEC; MANUFACTURER_PART_NUMBER: ASP-134604-01; MOUSER_PART_NUMBER: 200-ASP-134604-01; MOUSER_PRICE-STOCK: https://www.mouser.co.uk/ProductDetail/Samtec/ASP-134604-01?qs=Rp%2FUEJiACm00i8g2mQ6XNw%3D%3D
J3 J9 = Seeed-Connector; MPN: P125-1102A0BS116A1
J5 J8 J12 J13 = Seeed-Connector; MPN: F185-1104A1BSYA1
L1 = SparkFun-Passives; LCSC: C1882517; MPN: TFM322512ALVA100MTAA
L2 = SparkFun-Passives; LCSC: C1882517
L3 L4 = SparkFun-Passives; JLC_ROTATION: 90; LCSC: C339970
R9 = rcl; SPICEPREFIX: R
SV1 SV2 = con-lsta; OC_FARNELL: unknown; OC_NEWARK: unknown

## Nets
1V8 [power]: C5.1 C7.1 C14.1 C34.1 C35.1 C36.1 C49.1 C52.1 C53.1 C55.1 C68.1 C69.1 C74.1 C102.1 C103.1 C105.1 IC2.8 IC7.8 IC12.8 IC13.8 IC16.8 IC17.8 IC18.8 IC21.5 IC23.5 IC26.2 IC30.8 IC31.8 IC34.5 J12.1 J12.2
1V8-: C23.1 C30.1 C50.1 C51.1 C65.1 C66.1 C67.1 C70.1 C71.1 C72.1 C86.1 C92.1 C94.1 C95.1 C101.1 C104.1 C117.1 C125.1 IC3.4 IC3.9 IC5.4 IC5.9 IC14.4 IC15.4 IC19.4 IC20.4 IC22.2 IC24.2 IC28.4 IC29.3 IC32.4 IC33.4 IC33.9 IC35.2 J12.3 R14.1 R22.2 R28.1 R39.2 R45.1 R102.2 R106.1
1V8FMC [power]: J2.G39 J2.H40 J12.4
3V3 [power]: C13.1 J2.C39 J2.D36 J2.D38 J2.D40 J8.4
12V [power]: C12.1 J2.C35 J2.C37 J8.1 J9.1
AR_5V [power]: ARDUINO_NANO1.12 J1.1 R48.1 R49.1 R50.1 R51.1
AR_SCLIN: ARDUINO_NANO1.27 R51.2 R90.2
AR_SCLIN2: ARDUINO_NANO1.9 IC2.16 IC16.16 R49.2
AR_SDAIN: ARDUINO_NANO1.29 R50.2 R87.2
AR_SDAIN2: ARDUINO_NANO1.8 IC2.15 IC16.15 R48.2
ARVIN: ARDUINO_NANO1.15
BOOT1: C122.1 IC37.1
BOOT2: C107.1 IC36.1
C10: IC12.7 IC21.1 IO_C10.1 J2.C10 R4.2 SV2.13
C10N: IC17.7 IC21.6
C11: IC12.3 IC21.3 J2.C11 SV2.14
C11N: IC17.3 IC21.4
C14: IC13.7 IC23.1 J2.C14 SV2.16
C14N: IC18.7 IC23.6
C15: IC13.3 IC23.3 J2.C15 SV2.17
C15N: IC18.3 IC23.4
C18: IC30.3 IC34.1 J2.C18 SV2.19
C18N: IC31.3 IC34.6
C19: IC30.7 IC34.3 J2.C19 SV2.20
C19N: IC31.7 IC34.4
C22: J2.C22 R91.2 R109.1 SV1.1
C22I: IC28.3 IC33.1 IC35.1 R103.1
C22N: IC32.3 IC35.6
C23: J2.C23 R105.1 R110.1 SV1.2
C23I: IC28.7 IC33.7 IC35.3 R107.2
C23N: IC32.7 IC35.4
C26: ARDUINO_NANO1.4 J2.C26
C27: ARDUINO_NANO1.5 J2.C27
DACADDR: IC2.2
DACCLR: IC2.9 IC16.9
DACLDAC: IC2.1 IC16.1
DACN1: C57.2 R54.2 R64.2
DACN1I: C17.2 IC14.1 R74.1
DACN2: C61.1 R58.1 R65.2
DACN2I: C18.2 IC14.5 R75.1
DACN3: C56.2 R55.2 R68.2
DACN3I: C19.2 IC15.1 R76.1
DACN4: C60.1 R59.1 R69.2
DACN4I: C20.2 IC15.5 R77.1
DACN5: C96.1 R95.1 R98.2
DACN5I: C99.2 IC28.1 R100.1
DACN6: C89.1 R93.1 R99.2
DACN6I: C100.2 IC28.5 R101.1
DACOFFSETN: IC16.12 R17.2
DACOFFSETNI: IC10.7 R25.2 R115.2
DACOFFSETP: IC16.4 R31.2
DACP1: C59.2 IC12.1 R47.2
DACP2: C63.1 IC12.5 R56.1
DACP3: C58.2 IC13.1 R53.2
DACP4: C62.1 IC13.5 R57.1
DACP5: C90.1 IC30.1 R94.1
DACP6: C31.1 IC30.5 R92.1
FB1: IC37.4 R60.2 R73.1
FB2: IC36.4 R116.2 R118.1
GND [gnd]: ARDUINO_NANO1.14 ARDUINO_NANO1.19 C1.2 C3.2 C4.2 C5.2 C6.2 C7.2 C8.2 C9.2 C10.2 C11.2 C12.2 C13.2 C14.2 C15.2 C16.2 C17.1 C18.1 C19.1 C20.1 C21.2 C22.2 C23.2 C24.2 C25.2 C26.2 C27.2 C28.2 C29.2 C30.2 C31.2 C32.2 C33.2 C34.2 C35.2 C36.2 C37.2 C38.2 C39.1 C41.1 C42.2 C43.2 C44.1 C45.1 C46.1 C47.2 C48.2 C49.2 C50.2 C51.2 C52.2 C53.2 C54.2 C55.2 C56.1 C57.1 C58.1 C59.1 C60.2 C61.2 C62.2 C63.2 C65.2 C66.2 C67.2 C68.2 C69.2 C70.2 C71.2 C72.2 C73.2 C74.2 C75.2 C76.2 C77.2 C78.2 C79.2 C81.2 C82.2 C83.2 C84.2 C85.2 C86.2 C87.2 C88.2 C89.2 C90.2 C91.2 C92.2 C93.2 C94.2 C95.2 C96.2 C97.2 C98.2 C99.1 C100.1 C101.2 C102.2 C103.2 C104.2 C105.2 C106.1 C109.1 C110.2 C111.1 C116.2 C117.2 C120.2 C121.2 C123.2 C125.2 D1.A IC2.14 IC7.5 IC8.3 IC8.5 IC9.3 IC9.5 IC10.3 IC10.5 IC11.3 IC12.4 IC13.4 IC14.8 IC15.8 IC16.2 IC16.14 IC17.1 IC17.4 IC17.5 IC18.1 IC18.4 IC18.5 IC19.1 IC19.5 IC19.8 IC20.1 IC20.5 IC20.8 IC21.2 IC22.5 IC23.2 IC24.5 IC25.1 IC26.1 IC27.3 IC27.5 IC28.8 IC30.4 IC31.1 IC31.4 IC31.5 IC32.1 IC32.5 IC32.8 IC34.2 IC35.5 IC37.6 IC37.9 IO_C10.2 IO_C10.3 IO_C10.4 IO_C10.5 IO_H4.2 IO_H4.3 IO_H4.4 IO_H4.5 IO_H5.2 IO_H5.3 IO_H5.4 IO_H5.5 IO_H34.2 IO_H34.3 IO_H34.4 IO_H34.5 J1.3 J1.4 J1.6 J1.8 J2.C1 J2.C4 J2.C5 J2.C8 J2.C9 J2.C12 J2.C13 J2.C16 J2.C17 J2.C20 J2.C21 J2.C24 J2.C25 J2.C28 J2.C29 J2.C32 J2.C33 J2.C36 J2.C38 J2.C40 J2.D2 J2.D3 J2.D6 J2.D7 J2.D37 J2.D39 J2.G38 J2.G40 J2.H3 J2.H6 J2.H9 J2.H12 J2.H15 J2.H18 J2.H21 J2.H24 J2.H27 J2.H30 J2.H33 J2.H36 J2.H39 J3.1 J3.2 J5.4 J13.1 J13.2 J13.3 L4.2 OPIN.2 OPIN.3 OPIN.4 OPIN.5 PULSESOUT.2 PULSESOUT.3 PULSESOUT.4 PULSESOUT.5 R3.2 R4.1 R5.1 R10.1 R13.2 R15.1 R16.1 R19.1 R24.2 R26.1 R30.1 R42.2 R43.2 R52.1 R70.2 R80.2 R81.2 R82.2 R83.2 R84.1 R104.2 R108.1 R109.2 R110.2 R118.2 SV1.3 SV1.6 SV1.9 SV1.12 SV1.15 SV1.18 SV2.3 SV2.6 SV2.9 SV2.12 SV2.15 SV2.18
H4: IO_H4.1 J2.H4 R15.2
H5: IO_H5.1 J2.H5 R16.2
H13: J2.H13 SV1.7
H14: J2.H14 SV1.8
H16: J2.H16 SV1.10
H17: J2.H17 SV1.11
H19: J2.H19 SV1.13
H20: J2.H20 SV1.14
H22: J2.H22 SV1.16
H23: J2.H23 SV1.17
H25: J2.H25 SV1.19
H26: J2.H26 SV1.20
H28: J2.H28 SV2.1
H29: J2.H29 SV2.2
H31: J2.H31 SV2.4
H32: J2.H32 SV2.5
H34: IO_H34.1 J2.H34 R5.2 R21.2 R80.1 SV2.7
H34I: IC3.1 IC14.7 IC22.1 R23.1
H34N: IC19.7 IC22.6
H35: J2.H35 R27.1 R81.1 SV2.8
H35I: IC3.7 IC14.3 IC22.3 R29.2
H35N: IC19.3 IC22.4
H37: J2.H37 R37.2 R83.1 SV2.10
H37I: IC5.1 IC15.7 IC24.1 R41.1
H37N: IC20.7 IC24.6
H38: J2.H38 R44.1 R82.1 SV2.11
H38I: IC5.7 IC15.3 IC24.3 R46.2
H38N: IC20.3 IC24.4
IO1: OPIN.1 R2.2 R9.1 R42.1
N$1: IC33.2 R103.2 R104.1
N$2: IC10.6 R17.1 R115.1
N$3 [gnd]: IC1.3 R3.1
N$4: IC3.6 R29.1 R30.2
N$5: IC3.5 R27.2 R28.2
N$6: IC5.2 R41.2 R43.1
N$7: IC3.3 R21.1 R22.1
N$8 [gnd]: IC4.3 R13.1
N$9: IC6.2 R18.1 R19.2
N$10: IC6.3 R20.1 R25.1 R31.1
N$11: IC7.2 R6.1 R26.2
N$12: IC5.6 R46.1 R52.2
N$13: IC3.2 R23.2 R24.1
N$14: IC5.3 R37.1 R39.1
N$15: IC5.5 R44.2 R45.2
N$16: IC8.7 R62.2 R75.2
N$17: IC8.1 R63.2 R74.2
N$18: IC16.11 R92.2
N$19: IC8.2 R63.1 R64.1
N$20: IC8.6 R62.1 R65.1
N$21: IC2.13 R56.2
N$22: IC2.4 R47.1
N$23: IC2.5 R53.1
N$24: IC2.6 R54.1
N$25: IC2.7 R55.1
N$26: IC2.12 R57.2
N$27: IC2.11 R58.2
N$28: IC2.10 R59.2
N$29: C64.2 C120.1
N$30: IC29.1 R14.2 R70.1
N$31: IC9.7 R66.2 R77.2
N$32: IC9.1 R67.2 R76.2
N$33: IC9.2 R67.1 R68.1
N$34: IC9.6 R66.1 R69.1
N$36: J5.2 R72.1
N$37: IC10.2 R35.1 R61.1
N$40: J5.3 R86.1
N$41: IC16.10 R93.2
N$42: J5.1 R89.1
N$43: IC16.6 R94.2
N$44: IC16.7 R95.2
N$45: IC27.7 R96.2 R101.2
N$46: IC27.1 R97.2 R100.2
N$47: IC27.2 R97.1 R98.1
N$48: IC27.6 R96.1 R99.1
N$49: IC33.6 R107.1 R108.2
N$50: IC33.3 R91.1 R102.1
N$51: IC33.5 R105.2 R106.2
N$53: C123.1 C124.2
N$54 [gnd]: R60.1 R84.2
N$55: C108.1 C109.2
N$56: R116.1 R117.2
N$57: J13.4 R71.1
OP1BUF: IC6.6 IC7.3 R18.2 R72.2
OP2OUT: IC7.6 R6.2 R88.2
OPOUT_H10: J2.H10 R10.2 R78.2 R86.2 R88.1 SV1.4
OPOUT_H11: J2.H11 R78.1 SV1.5
PULSEOFFSETN: IC16.5 R61.2
PULSEOFFSETNI: IC10.1 R35.2 R85.2
PULSEOFFSETP: IC16.13 R79.2
PULSEOUT: PULSESOUT.1 R9.2 R34.2
PULSEOUTN1: IC14.2 IC19.2 R12.2
PULSEOUTN2: IC14.6 IC19.6 R38.2
PULSEOUTN3: IC15.2 IC20.2 R32.2
PULSEOUTN4: IC15.6 IC20.6 R40.2
PULSEOUTN5: IC28.2 IC32.2 R112.2
PULSEOUTN6: IC28.6 IC32.6 R114.2
PULSEOUTP1: IC12.2 IC17.2 R7.2
PULSEOUTP2: IC12.6 IC17.6 R33.2
PULSEOUTP3: IC13.2 IC18.2 R8.2
PULSEOUTP4: IC13.6 IC18.6 R36.2
PULSEOUTP5: IC30.2 IC31.2 R111.2
PULSEOUTP6: IC30.6 IC31.6 R113.2
PULSESUMIN: IC4.2 R1.1 R7.1 R8.1 R12.1 R32.1 R33.1 R36.1 R38.1 R40.1 R79.1 R85.1 R111.1 R112.1 R113.1 R114.1
PULSESUMOUT: IC4.6 R1.2 R34.1 R71.2
SCLIN: J2.H7 R90.1
SDAIN [power]: J2.H8 R87.1
SW1: C122.2 D1.C IC37.8 L3.1
SW2: C107.2 D2.C IC36.8 L4.1
TRANSIN: IC1.2 R2.1 R11.2
TRANSOUT: IC1.6 R11.1 R20.2 R89.2
VIN: C8.1 C11.1 C64.1 IC36.7 IC37.7 J9.2
VIN+ [power]: C1.1 C42.1 C121.1 C124.1 J1.5 L1.1 L3.2 R73.2
VIN+CLEAN [power]: C43.1 C110.1 IC11.1 L1.2
VIN- [power]: C41.2 C44.2 C106.2 C108.2 D2.A IC36.6 IC36.9 J1.7 L2.1 R117.1
VIN-CLEAN [power]: C45.2 C111.2 IC25.2 L2.2
VS+ [power]: C3.1 C4.1 C6.1 C9.1 C16.1 C22.1 C24.1 C26.1 C28.1 C32.1 C37.1 C38.1 C47.1 C48.1 C54.1 C73.1 C75.1 C78.1 C82.1 C84.1 C87.1 C91.1 C93.1 C97.1 C116.1 IC1.7 IC2.3 IC3.8 IC4.7 IC5.8 IC6.7 IC7.7 IC8.8 IC9.8 IC10.8 IC11.2 IC16.3 IC26.3 IC27.8 IC33.8 J1.2 J8.2
VS- [power]: C10.1 C15.1 C21.1 C25.1 C27.1 C29.1 C33.1 C39.2 C46.2 C76.1 C77.1 C79.1 C81.1 C83.1 C85.1 C88.1 C98.1 IC1.4 IC4.4 IC6.4 IC7.4 IC8.4 IC9.4 IC10.4 IC25.3 IC27.4 IC29.2 J8.3

## Tracks (layer width: path | path; a pad name or v marks a point on that pad's centre or on a via)
1V8  (via drill 0.3)
  top 0.406: C7.1 42.03,54.09 42.75,54.09 | 42.75,54.09 IC7.8 | IC26.2 99.43,4.26 C34.1 C74.1 100.57,5.39 IC26.2 | v42.75,53.88 42.75,54.09 | v36.38,56 32.5,59.88 C5.1 32.5,60 32.25,60.25 27,60.25 J12.2 J12.1 | C55.1 40.75,38.75 v41.5,38.75 43,38.75 IC16.8 43.25,38.75 43.5,38.5 v45,38.5 | v52.75,31.75 53.5,31 C36.1 | C14.1 53.62,38.75 54.25,38.12 55.25,38.12 v55.38,38 56,38.62 IC2.8 56.25,38.75 57,38 v60.5,38 | C35.1 79,67.5 79,66 IC12.8 78.75,66 v77.88,66 | C53.1 79,56.5 79,55 IC13.8 78.75,55 78.62,55.12 v77.88,55.12 | 79,44.5 79,44 IC30.8 | 79,44.5 79,45.5 C102.1 | C52.1 79,62.38 79,61 IC17.8 78.75,61 v77.88,61 | C69.1 79,51.38 79,50 IC18.8 78.75,50 78.62,50.12 v77.5,50.12 | C103.1 79.12,40.38 79.12,39 79,39 IC31.8 78.75,39 78.5,39.25 v76.75,39.25 | v72.12,38.5 72,38.5 71.5,38 C105.1 | v73.25,39.62 72.88,40 IC34.5 | v72.38,48.5 72,48.5 71.62,48.88 C49.1 | v72.12,57.5 72,57.5 71.5,58 C68.1 | v73.12,51 IC23.5 | v73.12,60 IC21.5 | v78,44.5 79,44.5 | v99.5,7.5 101,6 IC26.2
  route 0.406: v42.75,53.88 40.88,53.88 40.5,53.5 38.88,53.5 | v36.38,56 38.88,53.5 | 52.75,35.38 v52.75,31.75 | v55.38,38 52.75,35.38 | v45,38.5 46.75,38.5 47,38.75 49.38,38.75 52.75,35.38 | 71.5,44.62 68.38,41.5 68.38,41 68.88,40.5 | 71.5,44.62 72.38,45.5 v72.38,48.5 72.12,48.75 72.12,50.12 | 68.88,40.5 70.75,38.62 72,38.62 v72.12,38.5 v73.25,39.62 74,40.38 74.5,40.38 75.62,39.25 v76.75,39.25 76.88,39.12 77.62,39.12 78.12,38.62 78.12,38.25 80.75,35.62 80.75,32.25 99.5,13.5 v99.5,7.5 | 72.12,50.12 72.12,51 | 72.12,51 72.12,55.12 | 72.12,55.12 v72.12,57.5 73.12,58.5 73.12,59.5 | 72.12,51 v73.12,51 | 73.12,59.5 v73.12,60 | 72.12,50.12 v77.5,50.12 | 76.38,61 74.75,61 73.25,59.5 73.12,59.5 | 76.38,61 v77.88,61 | v78,44.5 71.62,44.5 71.5,44.62 | 72.12,55.12 v77.88,55.12 | v77.88,66 77.88,64.5 76.38,63 76.38,61 | v60.5,38 63.62,38 63.75,38.12 66.5,38.12 68.88,40.5 | 38.88,53.5 38.88,42.12 41.12,39.88 41.12,39.12 v41.5,38.75
1V8-  (via drill 0.3)
  top 0.305: IC28.4 75,30 C101.1 73.5,29.88 v73.5,29.25 | 73.38,23.5 73.38,24.88 C104.1 | 75.12,23.5 75.12,25 IC32.4 | IC35.2 70.25,27.75 70.88,27.75 71.12,27.5 v71.12,26.62 71.12,26.12 70.75,26.12 C30.1 | IC19.4 75,14 73.5,14 C66.1 73.5,14.12 73.38,14.12 72.88,14.62 70.88,14.62 70.5,15 C71.1 70.62,14.75 70.25,14.38 68,14.38 | IC14.4 75,19 C67.1 73.5,19.12 73,19.62 | 69.12,17.25 69.25,17.12 69.88,17.12 70,17 IC22.2 | 69.12,17.25 69.12,19.62 73,19.62 | 68,14.38 67.25,15.12 67.25,17.25 69.12,17.25 | v73.12,20.25 73.12,19.75 73,19.75 73,19.62 | v73.12,22.75 73.12,23.5 | C50.1 75,3 IC20.4 | C50.1 73.5,3.12 73,3.62 71,3.62 70.62,4 C70.1 70.62,4.12 71,4.12 71,5.75 70.88,5.88 70.25,5.88 70.12,6 IC24.2 | C23.1 57.25,1.38 58.12,0.5 64.12,0.5 64.12,1.12 R45.1 64.38,1.25 73.38,1.25 73.38,2.88 C50.1 | IC5.4 56.88,3.12 58.12,3.12 IC5.9 59,5.62 v60.25,5.62 | IC15.4 75,8 C51.1 73.38,8.12 73.38,9.38 68,9.38 66.25,11.12 66.12,11.12 | 66.12,11.12 65.38,10.38 64.75,10.38 64.5,10.12 R28.1 | 66.12,11.12 66.12,13.75 65.38,13.75 64.5,14.62 64.5,14.88 | 64.5,14.88 64.5,15.5 R106.1 | IC3.9 58.12,10.12 56.88,10.12 IC3.4 | 51,6.88 51,10.5 51.75,10.5 | 51,6.88 51,5.25 52.62,3.62 53.38,3.62 53.5,3.5 R39.2 | R22.2 51.75,10.5 | 51,6.88 53.88,6.88 54,6.75 56.38,6.75 56.38,8.5 C72.1 | v55.25,17 56.62,17 IC33.4 56.88,17.12 58.12,17.12 IC33.9 58.88,17.75 61.75,14.88 64.5,14.88 | R102.2 53.5,17.62 53,17.12 v52.88,17.12 52.75,17.12 49.88,20 42.12,20 v40.38,21.75 | v34.25,27.88 34.25,50.38 27,57.62 J12.3 | v51.75,14.12 51.75,10.5 | v68,14.25 68,14.38
  top 0.406: C86.1 94.98,15.06 C65.1 95.57,17.07 C125.1 95.7,17.8 IC29.3 89.03,14.54 84.45,14.54 84.17,14.82 84.17,14.99 R14.1 | 56.79,9.05 IC3.4 56.79,9.08 C94.1 | 56.79,9.05 56.37,8.63 | 56.37,8.63 C72.1 | C94.1 57.24,8.6 56.79,9.05 | C94.1 56.4,8.6 56.37,8.63 | IC33.4 56.79,15.96 C117.1 C95.1 56.79,16.18 IC33.4 | 56.79,1.96 IC5.4 56.79,2.18 C23.1 C92.1 56.79,1.96
  top 0.813: R14.1 83.7,15.47 83.47,15.47 82.96,15.98 82.96,22.04 81.5,23.5 75.12,23.5 73.38,23.5 73.12,23.5 71.9,23.5 70.53,24.87 C30.1 | C86.1 95.44,15.59 95.44,16.54 95.7,16.8 95.7,17.8
  route 0.305: v73.5,29.25 73.5,29 v71.12,26.62 | v73.12,20.25 v73.12,22.75 | v55.25,17 55.12,17.12 v52.88,17.12 52.88,17 52.5,16.62 | v40.38,21.75 v34.25,27.88 | v51.75,14.12 51.75,15.88 52.5,16.62 | 60.25,8.5 60.25,8.88 52.5,16.62 | 60.25,8.5 v60.25,5.62 | v68,14.25 68,11 65.5,8.5 60.25,8.5
1V8FMC  (via drill 0.3)
  route 0.406: v12.62,61.12 16.5,61.12 23.5,54.12 26,54.12 27,55.12 J12.4
  gnd 0.406: J2.G39 12,60.5 v12.62,61.12 13.12,61.62 13.12,61.75 J2.H40
3V3  (via drill 0.3)
  top 0.406: v31.75,61 C13.1
  route 0.406: v31.75,61 27,56.25 25,56.25 24,55.25 J8.4 23.88,55.38 17.38,61.88 12.38,61.88 8.88,58.38 | v7.5,57.25 7.75,57.25 8.88,58.38 | 8.88,58.38 v8.62,58.62 v7.38,59.88 7.5,60 v7.5,61.25
  gnd 0.406: v7.5,57.25 8,56.75 J2.D36 | v8.62,58.62 8.12,59.12 J2.D38 | v7.38,59.88 6.88,60.38 J2.C39 | v7.5,61.25 8,61.75 J2.D40
12V  (via drill 0.3)
  top 0.406: v31.75,64.12 32.38,64.12 32.5,64 C12.1
  route 0.406: v31.75,64.12 25.25,64.12 24,62.88 J8.1 23.88,62.75 9,62.75 8.25,62 7.25,62 6.12,60.88 v6.12,58.38
  gnd 0.406: v6.12,58.38 6.12,58
  gnd 0.813: J9.1 136.43,47 126,47 124.78,45.78 124.78,44.76 124.1,44.08 123.36,44.08 109.54,30.26 109.54,29.52 108.86,28.84 108.12,28.84 106,26.72 106,1 8,1 1,8 1,55 1.42,55.41 2,55.41 | 2,55.41 J2.C35 | 2,55.41 2,57 3,58 6.12,58 6.78,58 J2.C37
AR_5V
  top 0.406: R49.1 113.5,52 113.5,51.25 R48.1
  top 0.61: 115,37.62 110.62,37.62 109.14,36.14 107.94,36.14 107.32,35.52 107.32,34.32 J1.1 | 115,37.62 ARDUINO_NANO1.12 | R50.1 118,52 | 118,52 R51.1 | 118,52 118,51.62 117.84,51.46 117.84,49 | 115,37.62 117.84,40.46 117.84,49 | R48.1 115.43,49 117.84,49
AR_SCLIN  (via drill 0.3)
  top 0.305: R90.2 115.62,51 115.62,52 R51.2 115.62,52.12 115.62,52.62 119.88,52.62 120.12,52.38 v120.12,47
  route 0.305: v120.12,47 120.12,29 108.5,17.38 ARDUINO_NANO1.27
AR_SCLIN2  (via drill 0.3)
  top 0.305: v50.75,44.38 50,44.38 49,43.38 IC16.16 | v57.5,46 v54.62,46 | v59.38,44.12 60,43.5 61.75,43.5 61.88,43.38 IC2.16 62,43.25 64.25,43.25 v65.5,42 | 122.62,30 122.62,32.88 123.5,33.75 124.88,33.75 124.88,48.38 120.12,53.12 112.62,53.12 112.62,52 R49.2 | ARDUINO_NANO1.9 122.62,30 | v67.38,40.12 67.38,34.5 82,34.5 85.38,31.12 85.38,19.5 94.75,19.5 94.88,19.38 97.12,19.38 98.38,20.62 98.38,28.75 121.25,28.75 122.5,30 122.62,30
  route 0.305: v50.75,44.38 51.25,44.38 53.5,46.62 54,46.62 v54.62,46 | v59.38,44.12 v57.5,46 | v67.38,40.12 v65.5,42
AR_SDAIN  (via drill 0.3)
  top 0.305: R50.2 119.5,52 119.5,51 R87.2 119.5,50.88 119.5,46.38 v120.75,46.38
  route 0.305: v120.75,46.38 120.75,24.5 108.5,12.25 ARDUINO_NANO1.29
AR_SDAIN2  (via drill 0.3, 0.35)
  top 0.305: IC16.15 48.12,42.62 v47.62,43.12 | v51.12,46.62 57.75,46.62 v58.38,46 | v60.62,42.88 60.88,42.62 IC2.15 | 112.62,51 112.62,47.62 v117,47.62 | 112.62,51 R48.2 | v113,58 113,54.15 111.99,53.14 111.99,51.6 112.17,51.42 112.2,51.42 112.62,51
  route 0.305: v51.12,46.62 v47.62,43.12 | v60.62,42.88 60.62,43.75 v58.38,46 58.38,52.25 74.12,68 104.48,68 113,59.48 v113,58 | 119.38,47.62 120.38,47.62 122.12,45.88 122.12,28.88 123.5,27.5 ARDUINO_NANO1.8 | 119.38,47.62 v117,47.62 | 119.38,47.75 119.38,47.62
BOOT1
  top 0.61: IC37.1 137.63,43.91 137.4,43.67 135.1,43.67 C122.1
BOOT2
  top 0.61: IC36.1 137.63,20.91 137.4,20.67 135.1,20.67 C107.1
C10  (via drill 0.3)
  top 0.305: IC12.7 78.88,65.25 77.62,65.25 74.75,62.38 71.75,62.38 70.12,60.75 IC21.1 70,60.75 68.25,62.5 v66.25,62.5 | IO_C10.1 22.25,70.25 26.88,70.25 27,70.38 R4.2
  route 0.305: SV2.13 28,33.25 27.12,32.38 20.88,32.38 12.75,24.25 v7.38,24.25 7.38,24.38 5,26.75 5,60.5 7.12,62.62 8.12,62.62 15.5,70 IO_C10.1 29.88,70 31.25,71.38 33.62,71.38 33.88,71.12 36.12,71.12 36.25,71.25 58.75,71.25 66.25,63.75 v66.25,62.5
  gnd 0.305: v7.38,24.25 6.88,23.75 J2.C10
C10N  (via drill 0.3)
  top 0.305: v80,60.38 79,60.38 IC17.7 | v77.38,63 77.25,62.88 76,62.88 75,61.88 73.12,61.88 72,60.75 IC21.6
  route 0.305: v77.38,63 v80,60.38
C11  (via drill 0.3)
  top 0.305: v71,58.75 70.5,59.25 70.12,59.25 IC21.3 | IC12.3 75,64.62 74.38,64.62 v73.25,63.5 73.12,63.5 72.75,63.12 v64.5,63.12 | v55.62,61.5 55.5,61.62 42.88,61.62 36.25,55 v36.25,44.25 | v32.5,40.5 28,36 SV2.14
  route 0.305: v73.25,63.5 73.25,61 v71,58.75 | v7.38,25.5 13.25,25.5 22.62,34.88 27,34.88 28,35.88 SV2.14 | v64.5,63.12 61.38,63.12 60.25,64.25 58.38,64.25 v55.62,61.5 | v32.5,40.5 v36.25,44.25
  gnd 0.305: v7.38,25.5 6.88,25 J2.C11
C11N
  top 0.305: IC17.3 75,59.62 73.62,59.62 73.38,59.38 72,59.38 IC21.4
C14  (via drill 0.3)
  top 0.305: v74.5,52.25 70.62,52.25 70.12,51.75 IC23.1 | IC13.7 78.88,54.25 v77.88,54.25 77.75,54.25 75.12,56.88 v67.62,56.88 | v60.75,51.75 58.12,49.12 49.12,49.12 48.62,48.62 v37.88,48.62 | v35.38,48.62 35.38,27.25 34,27.25 33.62,27.62 33.62,42.12 29.12,42.12 28,41 SV2.16
  route 0.305: v77.88,54.25 76.5,54.25 v74.5,52.25 | v7.38,28.12 9,28.12 20.88,40 27.12,40 28,40.88 SV2.16 | v67.62,56.88 65.88,56.88 v60.75,51.75 | v35.38,48.62 v37.88,48.62
  gnd 0.305: v7.38,28.12 6.88,28.62 J2.C14
C14N  (via drill 0.3)
  top 0.305: v77.88,49.38 78.88,49.38 IC18.7 | v74,49.38 74,51.62 72,51.62 IC23.6
  route 0.305: v74,49.38 v77.88,49.38
C15  (via drill 0.3)
  top 0.305: 68.62,52.25 70,53.62 75,53.62 IC13.3 | 68.62,52.25 68.62,50.38 70,50.38 IC23.3 | v24.5,42.25 25.75,43.5 SV2.17 28.12,43.5 29.38,43.5 v33.62,47.75 | v66.88,52.38 68.38,52.38 68.5,52.25 68.62,52.25 | v62.38,47.88 38.25,47.88 v38.12,47.75
  route 0.305: v7.38,30.62 8.5,30.62 20.12,42.25 v24.5,42.25 | v62.38,47.88 v66.88,52.38 | v33.62,47.75 v38.12,47.75
  gnd 0.305: v7.38,30.62 6.88,30.12 J2.C15
C15N
  top 0.305: IC18.3 75,48.75 73.5,48.75 72,50.25 IC23.4
C18  (via drill 0.3)
  top 0.305: v37.62,45.12 38,45.5 53.38,45.5 53.5,45.38 58.12,45.38 58.25,45.25 66,45.25 68.69,42.56 | 68.69,42.56 70,41.25 70,40.75 IC34.1 | IC30.3 75,42.62 68.75,42.62 68.69,42.56 | v29.62,45.5 29.62,46.88 28,48.5 SV2.19
  route 0.305: v7.38,34.38 11.5,34.38 22.25,45.12 29.62,45.12 | v37.62,45.12 29.62,45.12 | 29.62,45.12 v29.62,45.5
  gnd 0.305: v7.38,34.38 J2.C18
C18N
  top 0.305: IC31.3 75.12,37.75 75.75,37.75 76,38 76,40.62 72,40.62 IC34.6
C19  (via drill 0.3)
  top 0.305: v37.62,46.62 38.25,46 v53.75,46 | v55,44.75 65.75,44.75 69.12,41.38 v69.12,41.25 69.12,39.38 70,39.38 IC34.3 | v77.38,43.25 78.88,43.25 IC30.7
  route 0.305: v6.25,34.5 6.62,34.5 7.25,35.12 11.5,35.12 22,45.62 22,46.38 22.62,47 24,47 | 24,47 37.25,47 v37.62,46.62 | v55,44.75 v53.75,46 | v77.38,43.25 71.12,43.25 v69.12,41.25 | SV2.20 24,47.12 24,47
  gnd 0.305: v6.25,34.5 6.75,35 J2.C19
C19N  (via drill 0.3)
  top 0.305: v77.38,38.38 78.88,38.38 IC31.7 | v73.62,38.38 72.75,39.25 72,39.25 IC34.4
  route 0.305: v73.62,38.38 v77.38,38.38
C22  (via drill 0.3)
  top 0.305: 51.75,15.25 52.25,14.75 54.38,14.75 54.38,15.5 R109.1 | 51.75,15.25 51.75,16.5 53.5,16.5 R91.2 | v6.25,38.38 6.25,35.12 6,35.12 5.62,34.75 5.62,26.12 7.62,26.12 12,21.75 12,6.88 19,6.88 22,3.88 23,3.88 | 23,3.88 41.12,3.88 42,3 43,3 50.5,10.5 50.5,15.25 51.75,15.25 | 23,3.88 SV1.1
  gnd 0.305: v6.25,38.38 6.75,38.88 J2.C22
C22I  (via drill 0.3)
  top 0.305: 56.25,19.5 54.62,19.5 54.5,19.62 R103.1 | 56.25,19.5 56.75,19 IC33.1 | v73.75,30.75 75,30.75 IC28.3 | v70.75,30.25 70.75,28.5 70.25,28.5 IC35.1 | v60.12,27.12 60,27.12 60,23.38 56.25,19.62 56.25,19.5
  route 0.305: v73.75,30.75 73.38,30.38 70.88,30.38 v70.75,30.25 63.25,30.25 v60.12,27.12
C22N
  top 0.305: IC32.3 75,25.75 74.38,25.75 73.75,26.38 73.75,28.38 72.12,28.38 IC35.6
C23  (via drill 0.3)
  top 0.305: R105.1 64.5,17.38 64.5,16.5 R110.1 64.75,16.5 v65.5,15.75 | v7.38,39.62 11.38,35.62 11.38,32.75 19.12,32.75 22.62,29.25 30.12,29.25 v30.88,28.5 | v25.12,7.62 27,9.5 38.88,9.5 v38.88,19.38
  route 0.305: v30.88,28.5 34.5,28.5 41.25,21.75 | 41.25,21.75 43,20 53.25,20 56,17.25 65.75,17.25 66.12,16.88 66.12,16.38 v65.5,15.75 | v25.12,7.62 23,5.5 SV1.2 | 41.25,21.75 v38.88,19.38
  gnd 0.305: v7.38,39.62 J2.C23
C23I  (via drill 0.3)
  top 0.305: 62.5,18.88 63,18.88 63.5,19.38 R107.2 | 62.5,18.88 62,18.38 61.25,18.38 IC33.7 | v77.88,31.25 78.88,31.25 IC28.7 | v69,27.62 69.38,27.25 70.12,27.25 IC35.3 | 62.5,18.88 62.5,19.5 v62.38,19.5 | v60.62,25.75 v60.62,23.88
  route 0.305: v77.88,31.25 75.12,31.25 73.75,29.88 71.25,29.88 69.44,28.06 | v69,27.62 69.44,28.06 | v62.38,19.5 62.38,22.12 v60.62,23.88 | v60.62,25.75 62.25,25.75 64.62,28.12 69.38,28.12 69.44,28.06
C23N  (via drill 0.3)
  top 0.305: v80,26.25 79,26.25 IC32.7 | v73.5,25.75 72.12,27.12 IC35.4
  route 0.305: v80,26.25 76.88,26.25 76.38,25.75 v73.5,25.75
C26  (via drill 0.3)
  top 0.305: v6.25,43.38 6.25,57.75 6.38,57.75 12,63.38 12,66.75 13.62,66.75 18,71.12 21.12,71.12 21.38,71.38 23.75,71.38 24,71.12 32.12,71.12 32.38,71.38 34.75,71.38 35,71.12 36.38,71.12 v37.12,71.88
  route 0.305: v37.12,71.88 101.25,71.88 125.12,48 125.12,18.88 123.62,17.38 ARDUINO_NANO1.4
  gnd 0.305: v6.25,43.38 6.75,43.88 J2.C26
C27  (via drill 0.3)
  top 0.305: v7.38,45.88 11.38,49.88 11.38,62 18.62,62 22.62,66 45,66 52.4,73.4 93.72,73.4 102.5,64.62 v104.38,64.62
  route 0.305: v104.38,64.62 122.62,46.38 122.62,29.62 123.88,28.38 124,28.38 124.62,27.75 124.62,20.88 123.62,19.88 ARDUINO_NANO1.5
  gnd 0.305: v7.38,45.88 6.88,45.38 J2.C27
DACCLR  (via drill 0.3)
  top 0.305: v50.5,38.75 49,38.75 IC16.9 | v57.38,38.75 61.88,38.75 IC2.9
  route 0.305: v57.38,38.75 v50.5,38.75
DACLDAC
  top 0.305: IC16.1 43.12,43.38 44.75,45 53.12,45 54.75,43.38 56,43.38 IC2.1
DACN1  (via drill 0.3)
  top 0.305: C57.2 40.5,24 40.5,25 R54.2 v41.25,25 | v38.75,26 R64.2
  route 0.305: v38.75,26 40.25,26 v41.25,25
DACN1I
  top 0.305: C17.2 73.5,22 73.5,21 R74.1 75,21 IC14.1
DACN2
  top 0.305: R58.1 49.62,24 49.62,23 C61.1 49.5,22.88 49,22.38 46.38,22.38 46.38,21.38 46.75,21 51.62,21 51.62,23.88 50.5,25 R65.2
DACN2I
  top 0.305: R75.1 80.62,20 80.62,19 C18.2 79,19 IC14.5
DACN3  (via drill 0.3)
  top 0.305: C56.2 54.5,24 54.5,25 R55.2 v55.25,25 | v52.88,25.5 53,25.5 53.5,26 R68.2
  route 0.305: v52.88,25.5 54.75,25.5 v55.25,25
DACN3I
  top 0.305: C19.2 73.5,11 73.5,10 R76.1 75,10 IC15.1
DACN4  (via drill 0.3)
  top 0.305: 63.62,23.5 63.62,24 R59.1 | 63.62,23.5 63.62,23 C60.1 | v65.25,25 R69.2 | 63.62,23.5 v62.88,23.5
  route 0.305: v65.25,25 64.38,25 v62.88,23.5
DACN4I
  top 0.305: R77.1 80.62,9 80.62,8 C20.2 79,8 IC15.5
DACN5
  top 0.305: R95.1 39.62,32 39.62,33 C96.1 39.62,33.12 39.62,34 R98.2
DACN5I
  top 0.305: C99.2 73.5,33 73.5,32 R100.1 75,32 IC28.1
DACN6
  top 0.305: C89.1 50.5,31 50.5,32 R93.1 50.5,32.12 50.5,33 R99.2
DACN6I
  top 0.305: R101.1 81.5,33 81.5,30 C100.2 81.5,29.88 81,29.38 79.62,29.38 79,30 IC28.5
DACOFFSETN  (via drill 0.3)
  top 0.305: v59.75,34.12 60.88,33 62.5,33 62.62,33.12 63.38,33.12 63.5,33 R17.2 | v50.62,39.75 49.75,40.62 49,40.62 IC16.12
  route 0.305: v59.75,34.12 57.75,36.12 57.75,38.25 58,38.5 58,39 57.25,39.75 v50.62,39.75
DACOFFSETNI  (via drill 0.3)
  top 0.305: R115.2 63.5,34 63.25,33.75 61.88,33.75 IC10.7 61.75,33.75 61,33.75 v59.5,35.25 | v51.12,43.12 51.75,43.12 R25.2 | v55.38,44 55.5,43.88 56.88,43.88 v57.62,43.12
  route 0.305: v51.12,43.12 54.5,43.12 v55.38,44 | v57.62,43.12 57.62,40.12 58.5,39.25 58.5,37.62 58.25,37.38 58.25,36.5 v59.5,35.25
DACOFFSETP  (via drill 0.3)
  top 0.305: v50.38,42.75 50.38,43.25 50.88,43.75 51.25,43.75 51.75,44.25 R31.2 | v45.62,41.25 43.12,41.25 IC16.4
  route 0.305: v50.88,41.38 45.75,41.38 v45.62,41.25
  gnd 0.305: v50.38,42.75 50.88,42.25 v50.88,41.38
DACP1
  top 0.305: C59.2 72.5,67 72.5,66 R47.2 75,66 IC12.1
DACP2
  top 0.305: R56.1 81.5,66 81.5,64 C63.1 81.5,63.88 81,63.38 79.62,63.38 79,64 IC12.5
DACP3
  top 0.305: C58.2 72.5,56 72.5,55 R53.2 75,55 IC13.1
DACP4
  top 0.305: R57.1 81.5,55 81.5,53 C62.1 81.5,52.88 81,52.38 79.62,52.38 79,53 IC13.5
DACP5
  top 0.305: C90.1 72.62,44 R94.1 72.75,44 75,44 IC30.1
DACP6
  top 0.305: 81.62,43 81.62,43.88 R92.1 | 81.62,43 81.62,42.38 C31.1 | 81.62,43 80.38,43 79.88,42.5 79.88,42.12 79,42.12 IC30.5
FB1
  top 0.305: IC37.4 138.38,40.12 138.38,40
  top 0.61: R73.1 R60.2 138.38,40 139,40
FB2
  top 0.61: R118.1 R116.2 135.74,17.09 IC36.4
GND  (via drill 0.3, 0.35)
  top 0.305: IC18.1 75.12,50 75.12,53 IC13.4 75,52.88 70,52.88 69.12,52 69.12,51.12 70,51.12 IC23.2 71,51 71,50 70.75,49.75 70.75,49 C49.2 70.62,48.75 71.5,47.88 75.12,47.88 IC18.4 75.12,48 76.88,48 | 76.88,48 78.88,48 IC18.5 | 76.56,4.81 76.38,5 75.12,5 IC20.1 75,5 74.75,5 73.88,5.88 72.12,5.88 72,6 IC24.5 | 76.56,4.81 78.25,3.12 78.88,3.12 IC20.5 79,2.88 80,1.88 84.88,1.88 v86,3 | IC20.8 78.88,4.88 76.62,4.88 76.56,4.81 | C15.2 v52,35 51.88,35 | 51.88,35 C97.2 | IC27.5 47.88,31 C89.2 49.5,30.88 50,30.38 51.12,30.38 51.12,31.62 51.62,32.12 51.88,32.12 51.88,35 | 59.12,30.38 61.12,30.38 61.75,31 IC10.5 | 59.12,30.38 v55.12,30.38 55,30.38 54.5,30.88 C36.2 | IC10.3 56.25,32.25 56.5,32 57.62,32 59.12,30.5 59.12,30.38 | IC19.8 78.88,16 v77,16 75.12,16 IC19.1 75,16 74.88,16 74,16.88 72.12,16.88 72,17 IC22.5 | 76.5,27 v77.88,27 78.88,27 IC32.8 | 76.5,27 75.12,27 IC32.1 | IC32.5 78.88,25.12 78.25,25.12 76.5,26.88 76.5,27 | R26.1 46.5,60.62 v45.5,59.62 44.38,58.5 44.38,58 IC7.5 | IC31.4 75.12,37 v77,37 78.88,37 IC31.5 | C100.1 80.5,30 v80.5,31 80.5,31.88 79,31.88 IC28.8 | C60.2 64.38,23 64.38,22.38 62.5,22.38 61.88,23 IC9.5 61.75,23 59.75,21 59.6,20.5 C116.2 59.75,20.5 | C5.2 33.5,60 33.5,61 C13.2 33.5,61.12 33.5,62 C10.2 33.5,62.12 33.5,63 C75.2 33.5,63.12 33.5,64 C12.2 33.62,64 34,64.38 45.38,64.38 OPIN.2 | C50.2 72.5,3 72.38,3.12 70.38,3.12 69.75,3.75 69.75,4 C70.2 69.62,4.12 67.5,6.25 67.38,6.25 67.31,6.31 | 71,40 71,39 70.75,38.75 70.62,38.75 70.62,38 C105.2 | IC34.2 71,40 | 69.12,59.5 69.12,60 IC21.2 | 69.12,59.5 69.12,59 69.38,58.75 69.75,58.75 70.5,58 C68.2 | 41.06,32.44 41.12,32.38 42.12,32.38 IC27.3